# EAGLE board MicroMod-Datalogging-CarrierBoard-Panel (EAGLE 9.5.2), part 1 of 4
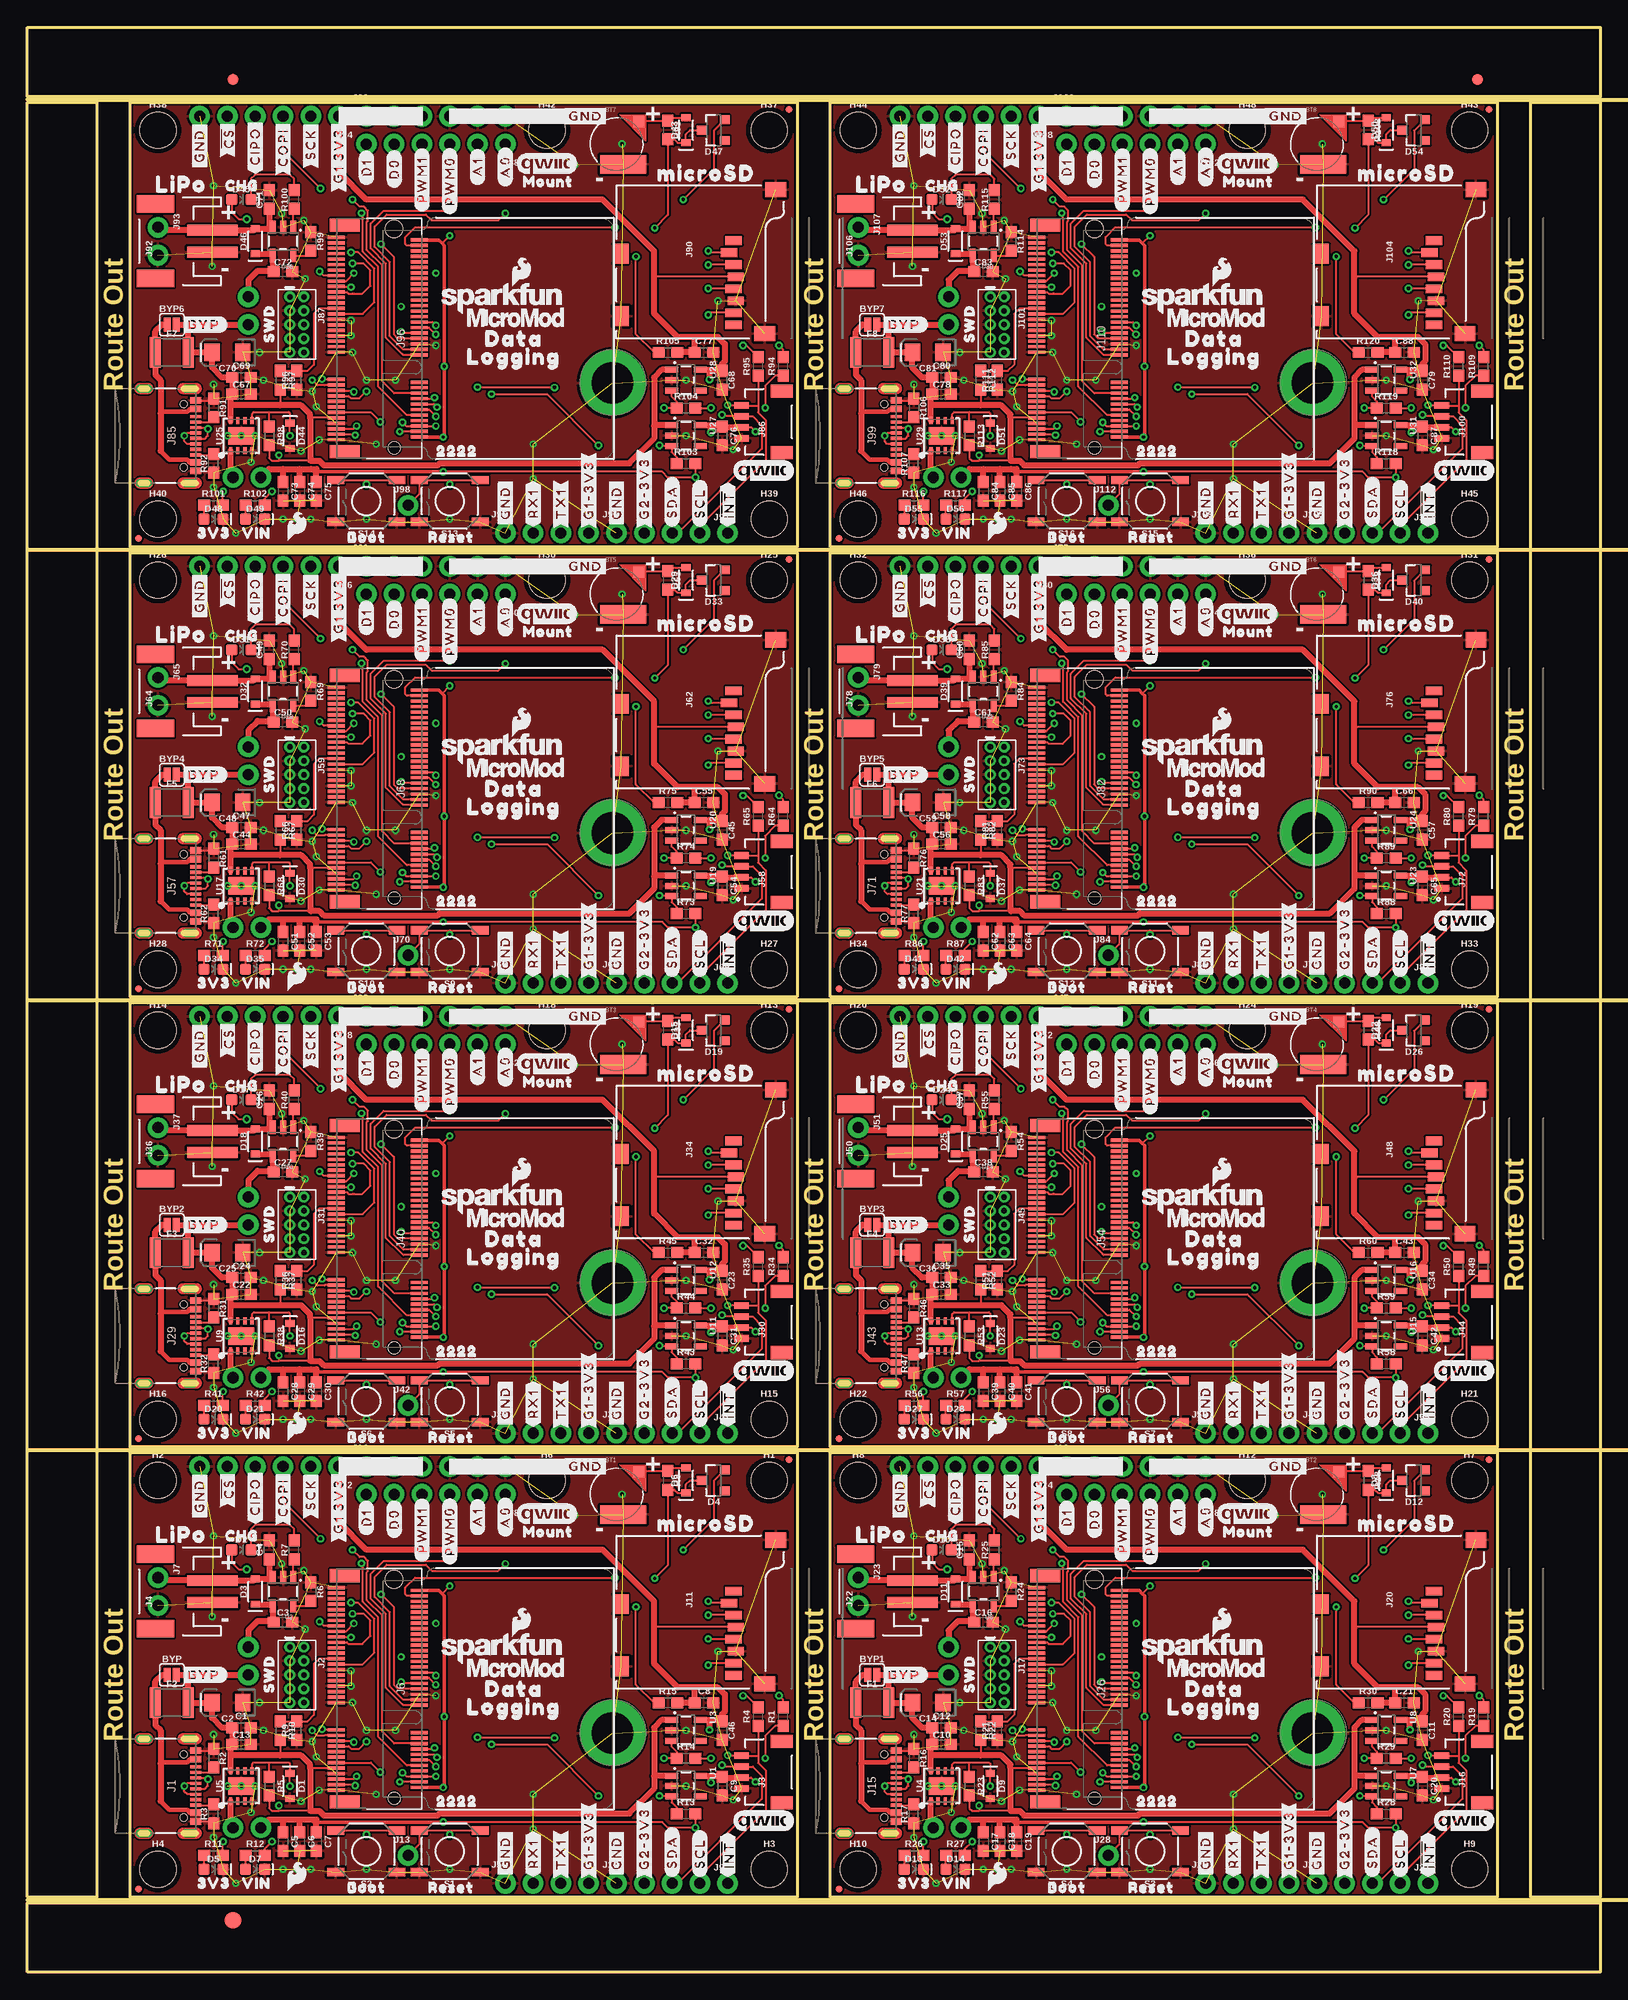
[diagram p0: board, top side]
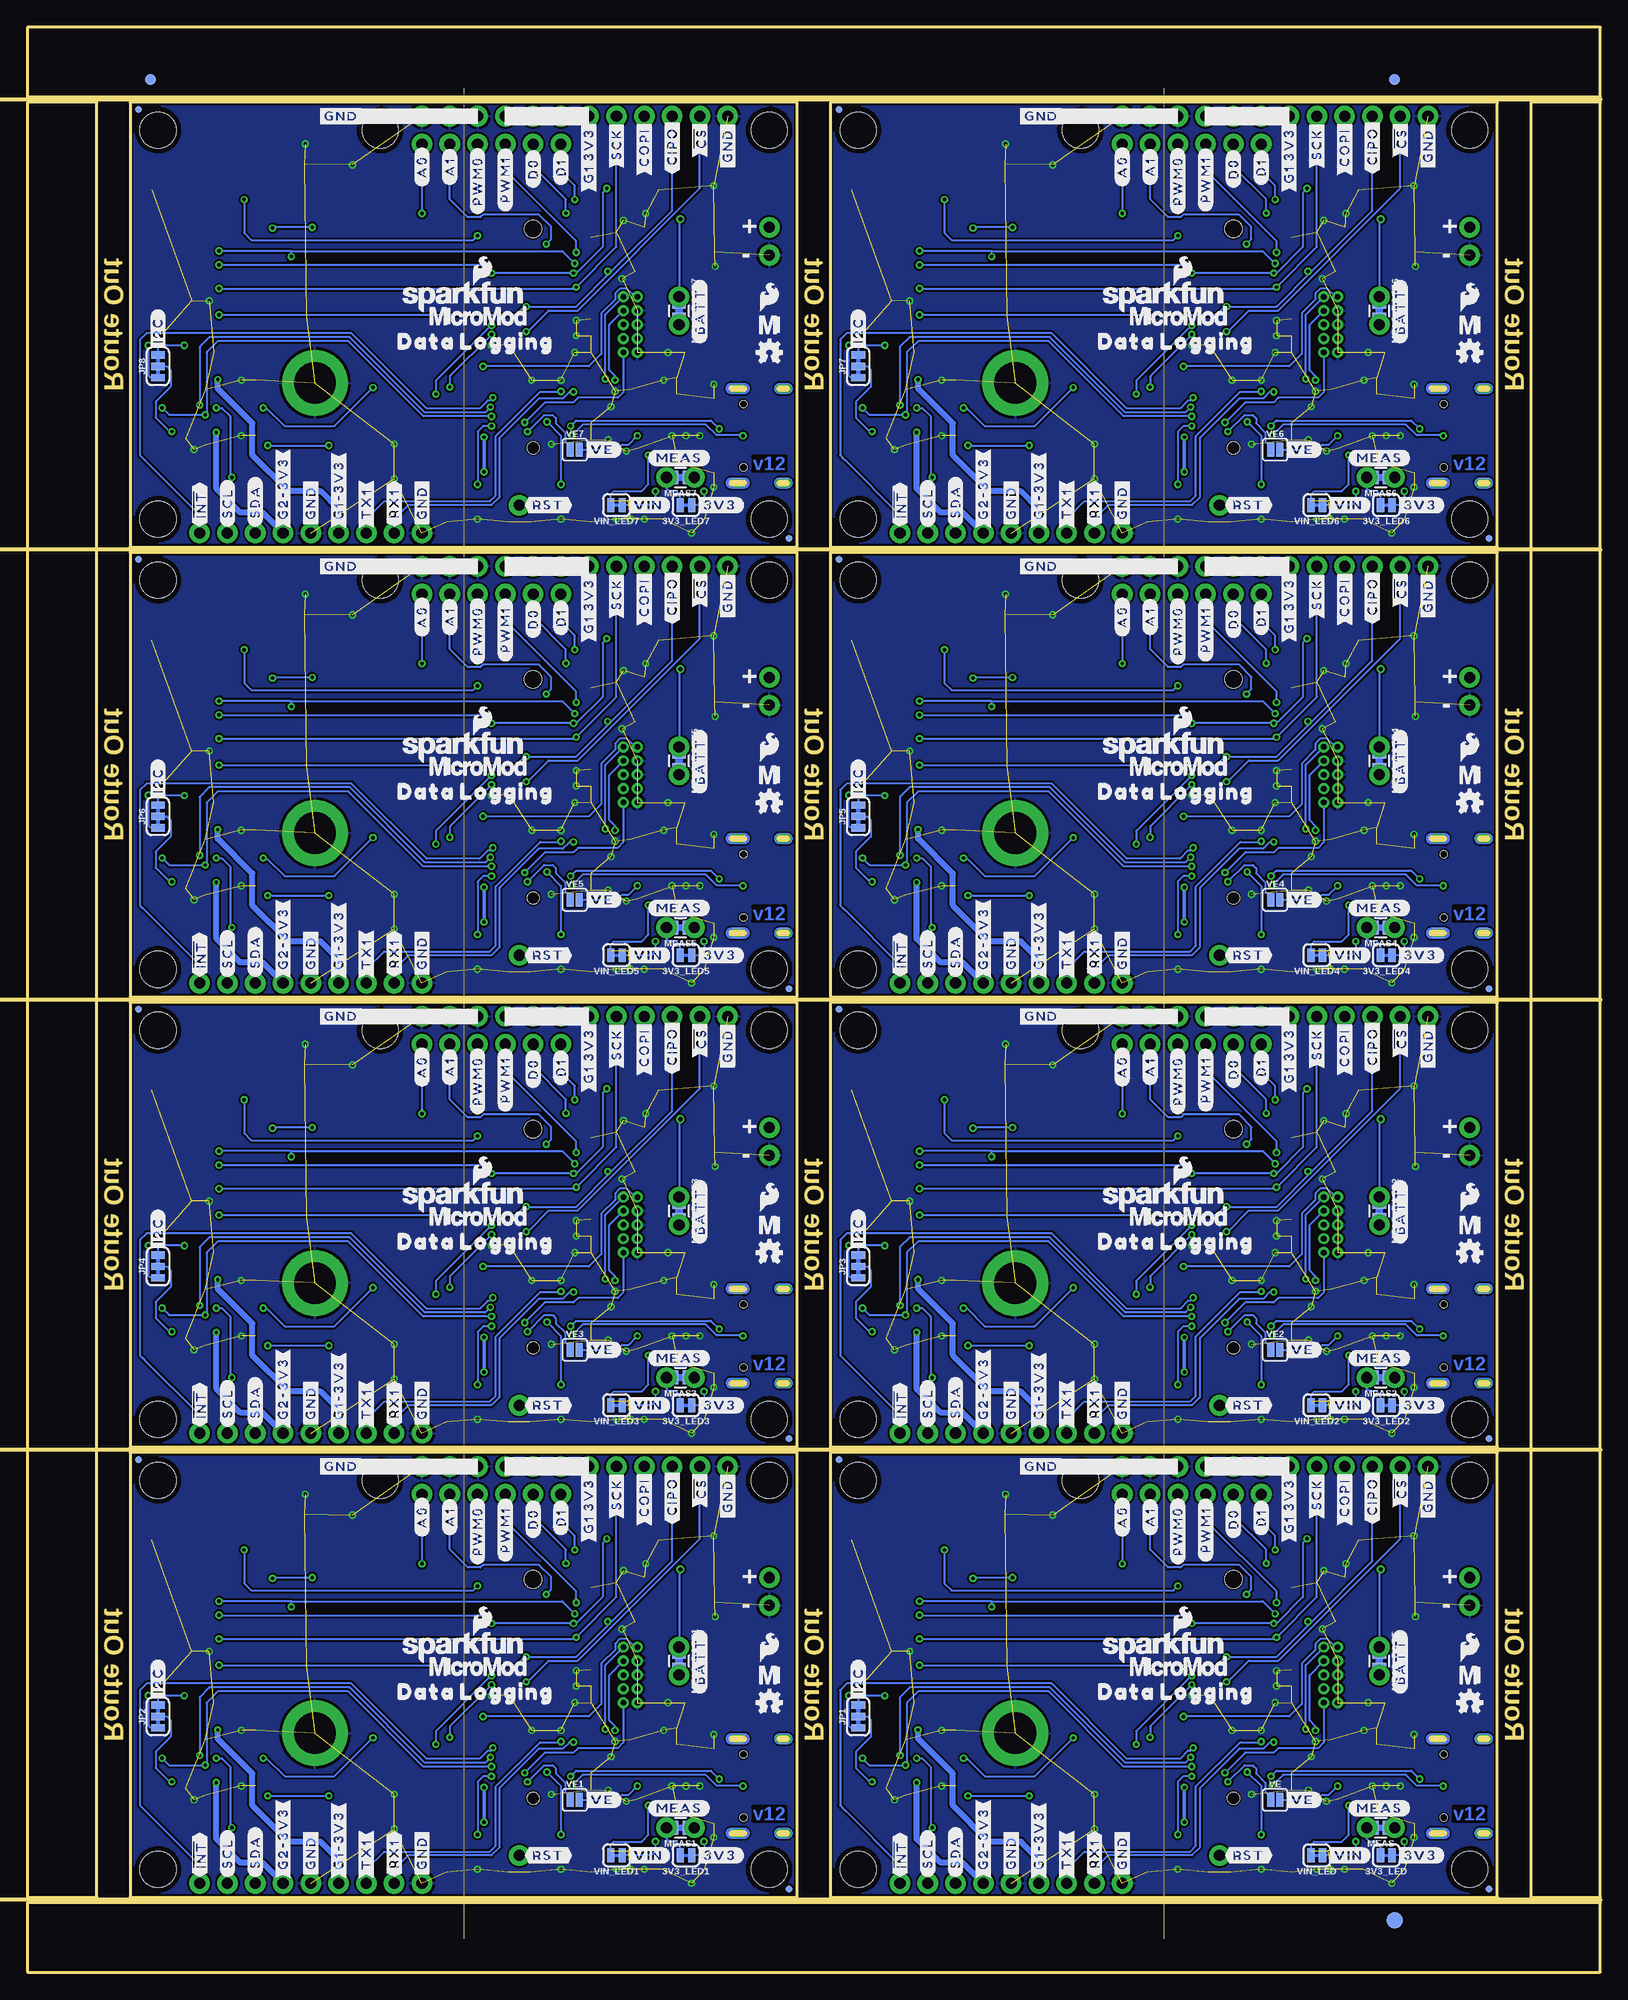
[diagram p1: board, bottom side, seen from below]

Size 143.76 x 177.8 mm. Coordinates in mm from the lower left corner, seen from the top.
Outline: 9.4,6.86 9.4,47.5 70.36,47.5 70.36,6.86 9.4,6.86
Outline: 73.41,6.86 73.41,47.5 134.37,47.5 134.37,6.86 73.41,6.86
Outline: 9.4,48.01 9.4,88.65 70.36,88.65 70.36,48.01 9.4,48.01
Outline: 73.41,48.01 73.41,88.65 134.37,88.65 134.37,48.01 73.41,48.01
Outline: 9.4,89.15 9.4,129.79 70.36,129.79 70.36,89.15 9.4,89.15
Outline: 73.41,89.15 73.41,129.79 134.37,129.79 134.37,89.15 73.41,89.15
Outline: 9.4,130.3 9.4,170.94 70.36,170.94 70.36,130.3 9.4,130.3
Outline: 73.41,130.3 73.41,170.94 134.37,170.94 134.37,130.3 73.41,130.3
Outline: 0,6.35 143.76,6.35 143.76,0 0,0 0,6.35
Outline: 137.41,170.94 143.76,170.94 143.76,6.86 137.41,6.86 137.41,170.94
Outline: 0,177.8 143.76,177.8 143.76,171.45 0,171.45 0,177.8
Outline: 0,170.94 6.35,170.94 6.35,6.86 0,6.86 0,170.94
Copper layers (1*16): Top 0.035mm / dielectric 1.5mm / Bottom 0.035mm
Design rules "MicroMod-Datalogging-CarrierBoard": minimum track width 7mil, minimum drill 12mil, track to track 7mil, track to pad 7mil, pad to pad 7mil, via to via 7mil, smd to smd 7mil, copper to edge 7mil, drill to drill 7mil, minimum pad ring 7mil, minimum via ring 7mil, stop-mask expansion 4mil, vias tented up to drill 25mil, thermal gap 10mil
Net classes: 0 default: width 0 mm, drill 0 mm
Milling: 5 lines

## Footprints (pad centres in the part's own frame; a part is rotated, then mirrored left to right if it is on the bottom)
SMT-JUMPER_2_NC_TRACE_SILK = smd 0.66 x 1.27: 1 -0.521,0; 2 0.521,0
ML414H_IV01E = smd 1 x 1: + 2.022,2.032 | smd 4.2 x 1.7: - 0.6,-1.85
SMT-JUMPER_2_NO_SILK = smd 0.635 x 1.27: 1 -0.406,0; 2 0.406,0
0603 = smd 1.1 x 1: 1 -0.85,0; 2 0.85,0
EIA3216 = smd 1.4 x 1.6: + 1.4,0; - -1.4,0
SOD-323 = smd 0.63 x 0.83: A 1.15,0; C -1.15,0
LED-0603 = smd 1 x 1: A -0.877,0; C 0.877,0
SOT23-3 = smd 0.8 x 0.9: 1 -0.95,-1; 2 0.95,-1; 3 0,1.1
FIDUCIAL-1X2 = smd 1 x 1: 1 0,0
FIDUCIAL-1.5X3 = smd 1.5 x 1.5: 1 0,0
1210 = smd 1 x 2.8: 1 -1.5,0; 2 1.5,0
FIDUCIAL-MICRO = smd 0.635 x 0.635: 1 0,0
STAND-OFF = hole 3.302: 0,0
STAND-OFF-REFLOW-M2.5 = drill 3.8 pad 6: 1 0,0
USB-C-16P-2LAYER-PADS = smd 0.3 x 1: A5 -1.25,-0.34; A6 -0.25,-0.34; A7 0.25,-0.34; A8 1.25,-0.34; B5 1.75,-0.34; B6 0.75,-0.34; B7 -0.75,-0.34; B8 -1.75,-0.34 | smd 0.6 x 1: GND -3.225,-0.34; GND2 3.225,-0.34; VBUS1 -2.45,-0.34; VBUS2 2.45,-0.34 | drill 0.4 pad 0.6 long: SHLD1 -4.318,-0.915; SHLD2 4.318,-0.915; SHLD3 -4.318,-5.095; SHLD4 4.318,-5.095 | hole 0.65: -2.89,-1.445; 2.89,-1.445
2X5-PTH-1.27MM = drill 0.508 pad 1: 1 -2.54,-0.635; 2 -2.54,0.635; 3 -1.27,-0.635; 4 -1.27,0.635; 5 0,-0.635; 6 0,0.635; 7 1.27,-0.635; 8 1.27,0.635; 9 2.54,-0.635; 10 2.54,0.635
JST04_1MM_RA = smd 0.6 x 1.35: 1 -1.5,0; 2 -0.5,0; 3 0.5,0; 4 1.5,0 | smd 1.2 x 2: NC1 2.8,-3.675; NC2 -2.8,-3.675
JST-2-SMD = smd 1 x 4.6: 1 -1,-3.7; 2 1,-3.7 | smd 1.6 x 3.4: NC1 -3.4,1.5; NC2 3.4,1.5
1X04_NO_SILK = drill 1.016 pad 1.88: 1 0,0; 2 2.54,0; 3 5.08,0; 4 7.62,0
M.2-CONNECTOR-E = smd 0.3 x 1.55: 1 9.25,-5.275; 2 9,2.275; 3 8.75,-5.275; 4 8.5,2.275; 5 8.25,-5.275; 6 8,2.275; 7 7.75,-5.275; 8 7.5,2.275; 9 7.25,-5.275; 10 7,2.275; 11 6.75,-5.275; 12 6.5,2.275; 13 6.25,-5.275; 14 6,2.275; 15 5.75,-5.275; 16 5.5,2.275; 17 5.25,-5.275; 18 5,2.275; 19 4.75,-5.275; 20 4.5,2.275; 21 4.25,-5.275; 22 4,2.275; 23 3.75,-5.275; 32 1.5,2.275; 33 1.25,-5.275; 34 1,2.275; 35 0.75,-5.275; 36 0.5,2.275; 37 0.25,-5.275; 38 0,2.275; 39 -0.25,-5.275; 40 -0.5,2.275; 41 -0.75,-5.275; 42 -1,2.275; 43 -1.25,-5.275; 44 -1.5,2.275; 45 -1.75,-5.275; 46 -2,2.275; 47 -2.25,-5.275; 48 -2.5,2.275; 49 -2.75,-5.275; 50 -3,2.275; 51 -3.25,-5.275; 52 -3.5,2.275; 53 -3.75,-5.275; 54 -4,2.275; 55 -4.25,-5.275; 56 -4.5,2.275; 57 -4.75,-5.275; 58 -5,2.275; 59 -5.25,-5.275; 60 -5.5,2.275; 61 -5.75,-5.275; 62 -6,2.275; 63 -6.25,-5.275; 64 -6.5,2.275; 65 -6.75,-5.275; 66 -7,2.275; 67 -7.25,-5.275; 68 -7.5,2.275; 69 -7.75,-5.275; 70 -8,2.275; 71 -8.25,-5.275; 72 -8.5,2.275; 73 -8.75,-5.275; 74 -9,2.275; 75 -9.25,-5.275 | smd 1.2 x 2.75: A1 10.35,-4.5; A2 -10.35,-4.5 | hole 1.1: 10,0 | hole 1.6: -10,0
1X02_NO_SILK = drill 1.016 pad 1.88: 1 0,0; 2 2.54,0
1X06_NO_SILK = drill 1.016 pad 1.88: 1 0,0; 2 2.54,0; 3 5.08,0; 4 7.62,0; 5 10.16,0; 6 12.7,0
1X01_NO_SILK = drill 1.016 pad 1.88: 1 0,0
MICRO-SD-SOCKET = smd 1.8 x 1.4: CD1 -2.05,0.4; CD2 -7.75,0.4 | smd 0.8 x 1.5: CS/DAT3 -7.84,10.3; DAT1 -1.24,10.7; DAT2 -8.94,10.7; DI/CMD -6.74,10.7; DO/DAT0 -2.34,10.7; GND -3.44,10.9; SCLK -4.54,10.7; VCC -5.64,10.9 | smd 1.4 x 1.9: GND1 -13.6,14.55; GND3 -0.45,13.55
SMT-JUMPER_3_2-NC_TRACE_SILK = smd 0.66 x 1.27: 1 -1.041,0; 2 0,0; 3 1.041,0
COMBO-JUMPER_2_NC_TRACE = smd 0.635 x 1.27: 1 -0.508,0; 2 0.508,0 | drill 1.016 pad 1.88: 3 -1.27,0; 4 1.27,0
TACTILE_SWITCH_SMD_5.2MM = smd 1.524 x 0.762: 1 -2.794,1.905; 2 2.794,1.905; 3 -2.794,-1.905; 4 2.794,-1.905
SOT23-5 = smd 0.55 x 1.2: 1 -0.95,-1.3; 2 0,-1.3; 3 0.95,-1.3; 4 0.95,1.3; 5 -0.95,1.3
UDFN-8 = smd 0.3 x 0.65: 1 -0.975,-1.375; 2 -0.325,-1.375; 3 0.325,-1.375; 4 0.975,-1.375; 5 0.975,1.375; 6 0.325,1.375; 7 -0.325,1.375; 8 -0.975,1.375 | smd 2.35 x 1.6: EP 0,0

## Placement (x,y rotation side)
3V3_LED  [SMT-JUMPER_2_NC_TRACE_SILK]  19.56,10.67 180 bottom
3V3_LED1  [SMT-JUMPER_2_NC_TRACE_SILK]  83.57,10.67 180 bottom
3V3_LED2  [SMT-JUMPER_2_NC_TRACE_SILK]  19.56,51.82 180 bottom
3V3_LED3  [SMT-JUMPER_2_NC_TRACE_SILK]  83.57,51.82 180 bottom
3V3_LED4  [SMT-JUMPER_2_NC_TRACE_SILK]  19.56,92.96 180 bottom
3V3_LED5  [SMT-JUMPER_2_NC_TRACE_SILK]  83.57,92.96 180 bottom
3V3_LED6  [SMT-JUMPER_2_NC_TRACE_SILK]  19.56,134.11 180 bottom
3V3_LED7  [SMT-JUMPER_2_NC_TRACE_SILK]  83.57,134.11 180 bottom
BT1  ML414H  [ML414H_IV01E]  53.85,43.69 0 top
BT2  ML414H  [ML414H_IV01E]  117.86,43.69 0 top
BT3  ML414H  [ML414H_IV01E]  53.85,84.84 0 top
BT4  ML414H  [ML414H_IV01E]  117.86,84.84 0 top
BT5  ML414H  [ML414H_IV01E]  53.85,125.98 0 top
BT6  ML414H  [ML414H_IV01E]  117.86,125.98 0 top
BT7  ML414H  [ML414H_IV01E]  53.85,167.13 0 top
BT8  ML414H  [ML414H_IV01E]  117.86,167.13 0 top
BYP  JUMPER-SMT_2_NO_SILK  [SMT-JUMPER_2_NO_SILK]  13.21,27.18 0 top
BYP1  JUMPER-SMT_2_NO_SILK  [SMT-JUMPER_2_NO_SILK]  77.22,27.18 0 top
BYP2  JUMPER-SMT_2_NO_SILK  [SMT-JUMPER_2_NO_SILK]  13.21,68.33 0 top
BYP3  JUMPER-SMT_2_NO_SILK  [SMT-JUMPER_2_NO_SILK]  77.22,68.33 0 top
BYP4  JUMPER-SMT_2_NO_SILK  [SMT-JUMPER_2_NO_SILK]  13.21,109.47 0 top
BYP5  JUMPER-SMT_2_NO_SILK  [SMT-JUMPER_2_NO_SILK]  77.22,109.47 0 top
BYP6  JUMPER-SMT_2_NO_SILK  [SMT-JUMPER_2_NO_SILK]  13.21,150.62 0 top
BYP7  JUMPER-SMT_2_NO_SILK  [SMT-JUMPER_2_NO_SILK]  77.22,150.62 0 top
C1  0.1uF  [0603]  19.56,22.35 0 top
C2  10uF  [EIA3216]  18.29,24.64 180 top
C3  4.7uF  [0603]  23.37,32 0 top
C4  4.7uF  [0603]  22.1,38.61 90 top
C5  1.0uF  [0603]  23.37,11.94 270 top
C6  0.1uF  [0603]  24.89,11.94 270 top
C7  0.22uF  [0603]  26.42,11.94 270 top
C8  1.0uF  [0603]  61.85,24.64 0 top
C9  1.0uF  [0603]  63.5,17.02 270 top
C10  0.22uF  [0603]  83.57,20.83 0 top
C11  0.1uF  [0603]  127.51,22.1 270 top
C12  0.1uF  [0603]  83.57,22.35 0 top
C13  0.22uF  [0603]  19.56,20.83 0 top
C14  10uF  [EIA3216]  82.3,24.64 180 top
C15  4.7uF  [0603]  86.11,38.61 90 top
C16  4.7uF  [0603]  87.38,32 0 top
C17  1.0uF  [0603]  87.38,11.94 270 top
C18  0.1uF  [0603]  88.9,11.94 270 top
C19  0.22uF  [0603]  90.42,11.94 270 top
C20  1.0uF  [0603]  127.51,17.02 270 top
C21  1.0uF  [0603]  125.86,24.64 0 top
C22  0.22uF  [0603]  19.56,61.98 0 top
C23  0.1uF  [0603]  63.5,63.25 270 top
C24  0.1uF  [0603]  19.56,63.5 0 top
C25  10uF  [EIA3216]  18.29,65.79 180 top
C26  4.7uF  [0603]  22.1,79.76 90 top
C27  4.7uF  [0603]  23.37,73.15 0 top
C28  1.0uF  [0603]  23.37,53.09 270 top
C29  0.1uF  [0603]  24.89,53.09 270 top
C30  0.22uF  [0603]  26.42,53.09 270 top
C31  1.0uF  [0603]  63.5,58.17 270 top
C32  1.0uF  [0603]  61.85,65.79 0 top
C33  0.22uF  [0603]  83.57,61.98 0 top
C34  0.1uF  [0603]  127.51,63.25 270 top
C35  0.1uF  [0603]  83.57,63.5 0 top
C36  10uF  [EIA3216]  82.3,65.79 180 top
C37  4.7uF  [0603]  86.11,79.76 90 top
C38  4.7uF  [0603]  87.38,73.15 0 top
C39  1.0uF  [0603]  87.38,53.09 270 top
C40  0.1uF  [0603]  88.9,53.09 270 top
C41  0.22uF  [0603]  90.42,53.09 270 top
C42  1.0uF  [0603]  127.51,58.17 270 top
C43  1.0uF  [0603]  125.86,65.79 0 top
C44  0.22uF  [0603]  19.56,103.12 0 top
C45  0.1uF  [0603]  63.5,104.39 270 top
C46  0.1uF  [0603]  63.5,22.1 270 top
C47  0.1uF  [0603]  19.56,104.65 0 top
C48  10uF  [EIA3216]  18.29,106.93 180 top
C49  4.7uF  [0603]  22.1,120.9 90 top
C50  4.7uF  [0603]  23.37,114.3 0 top
C51  1.0uF  [0603]  23.37,94.23 270 top
C52  0.1uF  [0603]  24.89,94.23 270 top
C53  0.22uF  [0603]  26.42,94.23 270 top
C54  1.0uF  [0603]  63.5,99.31 270 top
C55  1.0uF  [0603]  61.85,106.93 0 top
C56  0.22uF  [0603]  83.57,103.12 0 top
C57  0.1uF  [0603]  127.51,104.39 270 top
C58  0.1uF  [0603]  83.57,104.65 0 top
C59  10uF  [EIA3216]  82.3,106.93 180 top
C60  4.7uF  [0603]  86.11,120.9 90 top
C61  4.7uF  [0603]  87.38,114.3 0 top
C62  1.0uF  [0603]  87.38,94.23 270 top
C63  0.1uF  [0603]  88.9,94.23 270 top
C64  0.22uF  [0603]  90.42,94.23 270 top
C65  1.0uF  [0603]  127.51,99.31 270 top
C66  1.0uF  [0603]  125.86,106.93 0 top
C67  0.22uF  [0603]  19.56,144.27 0 top
C68  0.1uF  [0603]  63.5,145.54 270 top
C69  0.1uF  [0603]  19.56,145.8 0 top
C70  10uF  [EIA3216]  18.29,148.08 180 top
C71  4.7uF  [0603]  22.1,162.05 90 top
C72  4.7uF  [0603]  23.37,155.45 0 top
C73  1.0uF  [0603]  23.37,135.38 270 top
C74  0.1uF  [0603]  24.89,135.38 270 top
C75  0.22uF  [0603]  26.42,135.38 270 top
C76  1.0uF  [0603]  63.5,140.46 270 top
C77  1.0uF  [0603]  61.85,148.08 0 top
C78  0.22uF  [0603]  83.57,144.27 0 top
C79  0.1uF  [0603]  127.51,145.54 270 top
C80  0.1uF  [0603]  83.57,145.8 0 top
C81  10uF  [EIA3216]  82.3,148.08 180 top
C82  4.7uF  [0603]  86.11,162.05 90 top
C83  4.7uF  [0603]  87.38,155.45 0 top
C84  1.0uF  [0603]  87.38,135.38 270 top
C85  0.1uF  [0603]  88.9,135.38 270 top
C86  0.22uF  [0603]  90.42,135.38 270 top
C87  1.0uF  [0603]  127.51,140.46 270 top
C88  1.0uF  [0603]  125.86,148.08 0 top
D1  3.3V  [SOD-323]  24,17.02 270 top
D2  Yellow  [LED-0603]  19.56,38.61 0 top
D3  3A/10V/280mV  [SOD-323]  20.83,34.8 90 top
D4  BAS70-05  [SOT23-3]  62.74,44.96 90 top
D5  RED  [LED-0603]  17.02,9.4 0 top
D6  3A/10V/280mV  [SOD-323]  60.2,44.96 90 top
D7  Yellow  [LED-0603]  20.83,9.4 0 top
D8  3A/10V/280mV  [SOD-323]  124.21,44.96 90 top
D9  3.3V  [SOD-323]  88.01,17.02 270 top
D10  Yellow  [LED-0603]  83.57,38.61 0 top
D11  3A/10V/280mV  [SOD-323]  84.84,34.8 90 top
D12  BAS70-05  [SOT23-3]  126.75,44.96 90 top
D13  RED  [LED-0603]  81.03,9.4 0 top
D14  Yellow  [LED-0603]  84.84,9.4 0 top
D15  3A/10V/280mV  [SOD-323]  60.2,86.11 90 top
D16  3.3V  [SOD-323]  24,58.17 270 top
D17  Yellow  [LED-0603]  19.56,79.76 0 top
D18  3A/10V/280mV  [SOD-323]  20.83,75.95 90 top
D19  BAS70-05  [SOT23-3]  62.74,86.11 90 top
D20  RED  [LED-0603]  17.02,50.55 0 top
D21  Yellow  [LED-0603]  20.83,50.55 0 top
D22  3A/10V/280mV  [SOD-323]  124.21,86.11 90 top
D23  3.3V  [SOD-323]  88.01,58.17 270 top
D24  Yellow  [LED-0603]  83.57,79.76 0 top
D25  3A/10V/280mV  [SOD-323]  84.84,75.95 90 top
D26  BAS70-05  [SOT23-3]  126.75,86.11 90 top
D27  RED  [LED-0603]  81.03,50.55 0 top
D28  Yellow  [LED-0603]  84.84,50.55 0 top
D29  3A/10V/280mV  [SOD-323]  60.2,127.25 90 top
D30  3.3V  [SOD-323]  24,99.31 270 top
D31  Yellow  [LED-0603]  19.56,120.9 0 top
D32  3A/10V/280mV  [SOD-323]  20.83,117.09 90 top
D33  BAS70-05  [SOT23-3]  62.74,127.25 90 top
D34  RED  [LED-0603]  17.02,91.69 0 top
D35  Yellow  [LED-0603]  20.83,91.69 0 top
D36  3A/10V/280mV  [SOD-323]  124.21,127.25 90 top
D37  3.3V  [SOD-323]  88.01,99.31 270 top
D38  Yellow  [LED-0603]  83.57,120.9 0 top
D39  3A/10V/280mV  [SOD-323]  84.84,117.09 90 top
D40  BAS70-05  [SOT23-3]  126.75,127.25 90 top
D41  RED  [LED-0603]  81.03,91.69 0 top
D42  Yellow  [LED-0603]  84.84,91.69 0 top
D43  3A/10V/280mV  [SOD-323]  60.2,168.4 90 top
D44  3.3V  [SOD-323]  24,140.46 270 top
D45  Yellow  [LED-0603]  19.56,162.05 0 top
D46  3A/10V/280mV  [SOD-323]  20.83,158.24 90 top
D47  BAS70-05  [SOT23-3]  62.74,168.4 90 top
D48  RED  [LED-0603]  17.02,132.84 0 top
D49  Yellow  [LED-0603]  20.83,132.84 0 top
D50  3A/10V/280mV  [SOD-323]  124.21,168.4 90 top
D51  3.3V  [SOD-323]  88.01,140.46 270 top
D52  Yellow  [LED-0603]  83.57,162.05 0 top
D53  3A/10V/280mV  [SOD-323]  84.84,158.24 90 top
D54  BAS70-05  [SOT23-3]  126.75,168.4 90 top
D55  RED  [LED-0603]  81.03,132.84 0 top
D56  Yellow  [LED-0603]  84.84,132.84 0 top
E$1  [FIDUCIAL-1X2]  18.8,173.04 0 top
E$2  [FIDUCIAL-1X2]  18.8,173.04 0 bottom
E$3  [FIDUCIAL-1X2]  132.52,173.04 0 top
E$4  [FIDUCIAL-1X2]  132.52,173.04 0 bottom
E$5  [FIDUCIAL-1.5X3]  18.8,4.76 0 top
E$6  [FIDUCIAL-1.5X3]  18.8,4.76 0 bottom
F1  6V/2A  [1210]  77.22,24.64 0 top
F2  6V/2A  [1210]  13.21,24.64 0 top
F3  6V/2A  [1210]  13.21,65.79 0 top
F4  6V/2A  [1210]  77.22,65.79 0 top
F5  6V/2A  [1210]  13.21,106.93 0 top
F6  6V/2A  [1210]  77.22,106.93 0 top
F7  6V/2A  [1210]  13.21,148.08 0 top
F8  6V/2A  [1210]  77.22,148.08 0 top
FD1  FIDUCIALUFIDUCIAL  [FIDUCIAL-MICRO]  10.16,7.62 0 top
FD2  FIDUCIALUFIDUCIAL  [FIDUCIAL-MICRO]  69.6,46.86 0 top
FD3  FIDUCIALUFIDUCIAL  [FIDUCIAL-MICRO]  10.16,7.62 0 bottom
FD4  FIDUCIALUFIDUCIAL  [FIDUCIAL-MICRO]  69.6,46.86 0 bottom
FD5  FIDUCIALUFIDUCIAL  [FIDUCIAL-MICRO]  74.17,7.62 0 top
FD6  FIDUCIALUFIDUCIAL  [FIDUCIAL-MICRO]  133.6,46.86 0 top
FD7  FIDUCIALUFIDUCIAL  [FIDUCIAL-MICRO]  74.17,7.62 0 bottom
FD8  FIDUCIALUFIDUCIAL  [FIDUCIAL-MICRO]  133.6,46.86 0 bottom
FD9  FIDUCIALUFIDUCIAL  [FIDUCIAL-MICRO]  10.16,48.77 0 top
FD10  FIDUCIALUFIDUCIAL  [FIDUCIAL-MICRO]  69.6,88.01 0 top
FD11  FIDUCIALUFIDUCIAL  [FIDUCIAL-MICRO]  10.16,48.77 0 bottom
FD12  FIDUCIALUFIDUCIAL  [FIDUCIAL-MICRO]  69.6,88.01 0 bottom
FD13  FIDUCIALUFIDUCIAL  [FIDUCIAL-MICRO]  74.17,48.77 0 top
FD14  FIDUCIALUFIDUCIAL  [FIDUCIAL-MICRO]  133.6,88.01 0 top
FD15  FIDUCIALUFIDUCIAL  [FIDUCIAL-MICRO]  74.17,48.77 0 bottom
FD16  FIDUCIALUFIDUCIAL  [FIDUCIAL-MICRO]  133.6,88.01 0 bottom
FD17  FIDUCIALUFIDUCIAL  [FIDUCIAL-MICRO]  10.16,89.92 0 top
FD18  FIDUCIALUFIDUCIAL  [FIDUCIAL-MICRO]  69.6,129.16 0 top
FD19  FIDUCIALUFIDUCIAL  [FIDUCIAL-MICRO]  10.16,89.92 0 bottom
FD20  FIDUCIALUFIDUCIAL  [FIDUCIAL-MICRO]  69.6,129.16 0 bottom
FD21  FIDUCIALUFIDUCIAL  [FIDUCIAL-MICRO]  74.17,89.92 0 top
FD22  FIDUCIALUFIDUCIAL  [FIDUCIAL-MICRO]  133.6,129.16 0 top
FD23  FIDUCIALUFIDUCIAL  [FIDUCIAL-MICRO]  74.17,89.92 0 bottom
FD24  FIDUCIALUFIDUCIAL  [FIDUCIAL-MICRO]  133.6,129.16 0 bottom
FD25  FIDUCIALUFIDUCIAL  [FIDUCIAL-MICRO]  10.16,131.06 0 top
FD26  FIDUCIALUFIDUCIAL  [FIDUCIAL-MICRO]  69.6,170.31 0 top
FD27  FIDUCIALUFIDUCIAL  [FIDUCIAL-MICRO]  10.16,131.06 0 bottom
FD28  FIDUCIALUFIDUCIAL  [FIDUCIAL-MICRO]  69.6,170.31 0 bottom
FD29  FIDUCIALUFIDUCIAL  [FIDUCIAL-MICRO]  74.17,131.06 0 top
FD30  FIDUCIALUFIDUCIAL  [FIDUCIAL-MICRO]  133.6,170.31 0 top
FD31  FIDUCIALUFIDUCIAL  [FIDUCIAL-MICRO]  74.17,131.06 0 bottom
FD32  FIDUCIALUFIDUCIAL  [FIDUCIAL-MICRO]  133.6,170.31 0 bottom
H1  STAND-OFF  [STAND-OFF]  67.82,44.96 0 top
H2  STAND-OFF  [STAND-OFF]  11.94,44.96 0 top
H3  STAND-OFF  [STAND-OFF]  67.82,9.4 0 top
H4  STAND-OFF  [STAND-OFF]  11.94,9.4 0 top
H5  STAND-OFF-REFLOW2.5MM_TALL  [STAND-OFF-REFLOW-M2.5]  53.47,21.84 0 top
H6  STAND-OFF  [STAND-OFF]  47.5,44.96 0 top
H7  STAND-OFF  [STAND-OFF]  131.83,44.96 0 top
H8  STAND-OFF  [STAND-OFF]  75.95,44.96 0 top
H9  STAND-OFF  [STAND-OFF]  131.83,9.4 0 top
H10  STAND-OFF  [STAND-OFF]  75.95,9.4 0 top
H11  STAND-OFF-REFLOW2.5MM_TALL  [STAND-OFF-REFLOW-M2.5]  117.47,21.84 0 top
H12  STAND-OFF  [STAND-OFF]  111.51,44.96 0 top
H13  STAND-OFF  [STAND-OFF]  67.82,86.11 0 top
H14  STAND-OFF  [STAND-OFF]  11.94,86.11 0 top
H15  STAND-OFF  [STAND-OFF]  67.82,50.55 0 top
H16  STAND-OFF  [STAND-OFF]  11.94,50.55 0 top
H17  STAND-OFF-REFLOW2.5MM_TALL  [STAND-OFF-REFLOW-M2.5]  53.47,62.99 0 top
H18  STAND-OFF  [STAND-OFF]  47.5,86.11 0 top
H19  STAND-OFF  [STAND-OFF]  131.83,86.11 0 top
H20  STAND-OFF  [STAND-OFF]  75.95,86.11 0 top
H21  STAND-OFF  [STAND-OFF]  131.83,50.55 0 top
H22  STAND-OFF  [STAND-OFF]  75.95,50.55 0 top
H23  STAND-OFF-REFLOW2.5MM_TALL  [STAND-OFF-REFLOW-M2.5]  117.47,62.99 0 top
H24  STAND-OFF  [STAND-OFF]  111.51,86.11 0 top
H25  STAND-OFF  [STAND-OFF]  67.82,127.25 0 top
H26  STAND-OFF  [STAND-OFF]  11.94,127.25 0 top
H27  STAND-OFF  [STAND-OFF]  67.82,91.69 0 top
H28  STAND-OFF  [STAND-OFF]  11.94,91.69 0 top
H29  STAND-OFF-REFLOW2.5MM_TALL  [STAND-OFF-REFLOW-M2.5]  53.47,104.14 0 top
H30  STAND-OFF  [STAND-OFF]  47.5,127.25 0 top
H31  STAND-OFF  [STAND-OFF]  131.83,127.25 0 top
H32  STAND-OFF  [STAND-OFF]  75.95,127.25 0 top
H33  STAND-OFF  [STAND-OFF]  131.83,91.69 0 top
H34  STAND-OFF  [STAND-OFF]  75.95,91.69 0 top
H35  STAND-OFF-REFLOW2.5MM_TALL  [STAND-OFF-REFLOW-M2.5]  117.47,104.14 0 top
H36  STAND-OFF  [STAND-OFF]  111.51,127.25 0 top
H37  STAND-OFF  [STAND-OFF]  67.82,168.4 0 top
H38  STAND-OFF  [STAND-OFF]  11.94,168.4 0 top
H39  STAND-OFF  [STAND-OFF]  67.82,132.84 0 top
H40  STAND-OFF  [STAND-OFF]  11.94,132.84 0 top
H41  STAND-OFF-REFLOW2.5MM_TALL  [STAND-OFF-REFLOW-M2.5]  53.47,145.29 0 top
H42  STAND-OFF  [STAND-OFF]  47.5,168.4 0 top
H43  STAND-OFF  [STAND-OFF]  131.83,168.4 0 top
H44  STAND-OFF  [STAND-OFF]  75.95,168.4 0 top
H45  STAND-OFF  [STAND-OFF]  131.83,132.84 0 top
H46  STAND-OFF  [STAND-OFF]  75.95,132.84 0 top
H47  STAND-OFF-REFLOW2.5MM_TALL  [STAND-OFF-REFLOW-M2.5]  117.47,145.29 0 top
H48  STAND-OFF  [STAND-OFF]  111.51,168.4 0 top
J1  [USB-C-16P-2LAYER-PADS]  15.75,17.02 270 top
J2  JTAG  [2X5-PTH-1.27MM]  24.64,27.18 270 top
J3  QWIIC_RIGHT_ANGLE  [JST04_1MM_RA]  65.28,18.29 90 top
J4  [JST-2-SMD]  13.21,34.8 90 top
J5  UART  [1X04_NO_SILK]  43.69,8.13 0 top
J6  MICROMOD-2222-C  [M.2-CONNECTOR-E]  33.53,25.91 270 top
J7  [1X02_NO_SILK]  11.94,36.07 270 top
J8  Dedicated  [1X06_NO_SILK]  43.69,43.69 180 top
J9  [1X01_NO_SILK]  64.01,8.13 0 top
J10  [1X06_NO_SILK]  30.99,46.23 0 top
J11  microSD  [MICRO-SD-SOCKET]  53.85,25.91 270 top
J12  SPI  [1X06_NO_SILK]  28.45,46.23 180 top
J13  [1X01_NO_SILK]  34.8,10.67 0 top
J14  I2C  [1X04_NO_SILK]  53.85,8.13 0 top
J15  [USB-C-16P-2LAYER-PADS]  79.76,17.02 270 top
J16  QWIIC_RIGHT_ANGLE  [JST04_1MM_RA]  129.29,18.29 90 top
J17  JTAG  [2X5-PTH-1.27MM]  88.65,27.18 270 top
J18  Dedicated  [1X06_NO_SILK]  107.7,43.69 180 top
J19  [1X06_NO_SILK]  95,46.23 0 top
J20  microSD  [MICRO-SD-SOCKET]  117.86,25.91 270 top
J21  I2C  [1X04_NO_SILK]  117.86,8.13 0 top
J22  [JST-2-SMD]  77.22,34.8 90 top
J23  [1X02_NO_SILK]  75.95,36.07 270 top
J24  SPI  [1X06_NO_SILK]  92.46,46.23 180 top
J25  UART  [1X04_NO_SILK]  107.7,8.13 0 top
J26  MICROMOD-2222-C  [M.2-CONNECTOR-E]  97.54,25.91 270 top
J27  [1X01_NO_SILK]  128.02,8.13 0 top
J28  [1X01_NO_SILK]  98.81,10.67 0 top
J29  [USB-C-16P-2LAYER-PADS]  15.75,58.17 270 top
J30  QWIIC_RIGHT_ANGLE  [JST04_1MM_RA]  65.28,59.44 90 top
J31  JTAG  [2X5-PTH-1.27MM]  24.64,68.33 270 top
J32  Dedicated  [1X06_NO_SILK]  43.69,84.84 180 top
J33  [1X06_NO_SILK]  30.99,87.38 0 top
J34  microSD  [MICRO-SD-SOCKET]  53.85,67.06 270 top
J35  I2C  [1X04_NO_SILK]  53.85,49.28 0 top
J36  [JST-2-SMD]  13.21,75.95 90 top
J37  [1X02_NO_SILK]  11.94,77.22 270 top
J38  SPI  [1X06_NO_SILK]  28.45,87.38 180 top
J39  UART  [1X04_NO_SILK]  43.69,49.28 0 top
J40  MICROMOD-2222-C  [M.2-CONNECTOR-E]  33.53,67.06 270 top
J41  [1X01_NO_SILK]  64.01,49.28 0 top
J42  [1X01_NO_SILK]  34.8,51.82 0 top
J43  [USB-C-16P-2LAYER-PADS]  79.76,58.17 270 top
J44  QWIIC_RIGHT_ANGLE  [JST04_1MM_RA]  129.29,59.44 90 top
J45  JTAG  [2X5-PTH-1.27MM]  88.65,68.33 270 top
J46  Dedicated  [1X06_NO_SILK]  107.7,84.84 180 top
J47  [1X06_NO_SILK]  95,87.38 0 top
J48  microSD  [MICRO-SD-SOCKET]  117.86,67.06 270 top
J49  I2C  [1X04_NO_SILK]  117.86,49.28 0 top
J50  [JST-2-SMD]  77.22,75.95 90 top
J51  [1X02_NO_SILK]  75.95,77.22 270 top
J52  SPI  [1X06_NO_SILK]  92.46,87.38 180 top
J53  UART  [1X04_NO_SILK]  107.7,49.28 0 top
J54  MICROMOD-2222-C  [M.2-CONNECTOR-E]  97.54,67.06 270 top
J55  [1X01_NO_SILK]  128.02,49.28 0 top
J56  [1X01_NO_SILK]  98.81,51.82 0 top
J57  [USB-C-16P-2LAYER-PADS]  15.75,99.31 270 top
J58  QWIIC_RIGHT_ANGLE  [JST04_1MM_RA]  65.28,100.58 90 top
J59  JTAG  [2X5-PTH-1.27MM]  24.64,109.47 270 top
J60  Dedicated  [1X06_NO_SILK]  43.69,125.98 180 top
J61  [1X06_NO_SILK]  30.99,128.52 0 top
J62  microSD  [MICRO-SD-SOCKET]  53.85,108.2 270 top
J63  I2C  [1X04_NO_SILK]  53.85,90.42 0 top
J64  [JST-2-SMD]  13.21,117.09 90 top
J65  [1X02_NO_SILK]  11.94,118.36 270 top
J66  SPI  [1X06_NO_SILK]  28.45,128.52 180 top
J67  UART  [1X04_NO_SILK]  43.69,90.42 0 top
J68  MICROMOD-2222-C  [M.2-CONNECTOR-E]  33.53,108.2 270 top
J69  [1X01_NO_SILK]  64.01,90.42 0 top
J70  [1X01_NO_SILK]  34.8,92.96 0 top
J71  [USB-C-16P-2LAYER-PADS]  79.76,99.31 270 top
J72  QWIIC_RIGHT_ANGLE  [JST04_1MM_RA]  129.29,100.58 90 top
J73  JTAG  [2X5-PTH-1.27MM]  88.65,109.47 270 top
J74  Dedicated  [1X06_NO_SILK]  107.7,125.98 180 top
J75  [1X06_NO_SILK]  95,128.52 0 top
J76  microSD  [MICRO-SD-SOCKET]  117.86,108.2 270 top
J77  I2C  [1X04_NO_SILK]  117.86,90.42 0 top
J78  [JST-2-SMD]  77.22,117.09 90 top
J79  [1X02_NO_SILK]  75.95,118.36 270 top
J80  SPI  [1X06_NO_SILK]  92.46,128.52 180 top
J81  UART  [1X04_NO_SILK]  107.7,90.42 0 top
J82  MICROMOD-2222-C  [M.2-CONNECTOR-E]  97.54,108.2 270 top
J83  [1X01_NO_SILK]  128.02,90.42 0 top
J84  [1X01_NO_SILK]  98.81,92.96 0 top
J85  [USB-C-16P-2LAYER-PADS]  15.75,140.46 270 top
J86  QWIIC_RIGHT_ANGLE  [JST04_1MM_RA]  65.28,141.73 90 top
J87  JTAG  [2X5-PTH-1.27MM]  24.64,150.62 270 top
J88  Dedicated  [1X06_NO_SILK]  43.69,167.13 180 top
J89  [1X06_NO_SILK]  30.99,169.67 0 top
J90  microSD  [MICRO-SD-SOCKET]  53.85,149.35 270 top
J91  I2C  [1X04_NO_SILK]  53.85,131.57 0 top
J92  [JST-2-SMD]  13.21,158.24 90 top
J93  [1X02_NO_SILK]  11.94,159.51 270 top
J94  SPI  [1X06_NO_SILK]  28.45,169.67 180 top
J95  UART  [1X04_NO_SILK]  43.69,131.57 0 top
J96  MICROMOD-2222-C  [M.2-CONNECTOR-E]  33.53,149.35 270 top
J97  [1X01_NO_SILK]  64.01,131.57 0 top
J98  [1X01_NO_SILK]  34.8,134.11 0 top
J99  [USB-C-16P-2LAYER-PADS]  79.76,140.46 270 top
J100  QWIIC_RIGHT_ANGLE  [JST04_1MM_RA]  129.29,141.73 90 top
J101  JTAG  [2X5-PTH-1.27MM]  88.65,150.62 270 top
J102  Dedicated  [1X06_NO_SILK]  107.7,167.13 180 top
J103  [1X06_NO_SILK]  95,169.67 0 top
J104  microSD  [MICRO-SD-SOCKET]  117.86,149.35 270 top
J105  I2C  [1X04_NO_SILK]  117.86,131.57 0 top
J106  [JST-2-SMD]  77.22,158.24 90 top
J107  [1X02_NO_SILK]  75.95,159.51 270 top
J108  SPI  [1X06_NO_SILK]  92.46,169.67 180 top
J109  UART  [1X04_NO_SILK]  107.7,131.57 0 top
J110  MICROMOD-2222-C  [M.2-CONNECTOR-E]  97.54,149.35 270 top
J111  [1X01_NO_SILK]  128.02,131.57 0 top
J112  [1X01_NO_SILK]  98.81,134.11 0 top
JP1  [SMT-JUMPER_3_2-NC_TRACE_SILK]  67.82,23.37 90 bottom
JP2  [SMT-JUMPER_3_2-NC_TRACE_SILK]  131.83,23.37 90 bottom
JP3  [SMT-JUMPER_3_2-NC_TRACE_SILK]  67.82,64.52 90 bottom
JP4  [SMT-JUMPER_3_2-NC_TRACE_SILK]  131.83,64.52 90 bottom
JP5  [SMT-JUMPER_3_2-NC_TRACE_SILK]  67.82,105.66 90 bottom
JP6  [SMT-JUMPER_3_2-NC_TRACE_SILK]  131.83,105.66 90 bottom
JP7  [SMT-JUMPER_3_2-NC_TRACE_SILK]  67.82,146.81 90 bottom
JP8  [SMT-JUMPER_3_2-NC_TRACE_SILK]  131.83,146.81 90 bottom
LOGO1  SFE_LOGO_NAME_FLAME.1_INCH  [SFE_LOGO_NAME_FLAME_.1]  43.43,29.59 0 top
LOGO2  QWIIC_LOGO_CONNECTOR  [QWIIC_5.5MM]  67.31,13.84 0 top
LOGO3  OSHW-LOGOMINI  [OSHW-LOGO-MINI]  11.94,24.64 0 bottom
LOGO4  SFE_LOGO_NAME_FLAME.1_INCH  [SFE_LOGO_NAME_FLAME_.1]  39.88,29.72 0 bottom
LOGO5  QWIIC_LOGO_CONNECTOR  [QWIIC_5.5MM]  47.5,41.91 0 top
LOGO6  SFE_LOGO_NAME_FLAME.1_INCH  [SFE_LOGO_NAME_FLAME_.1]  107.44,29.59 0 top
LOGO7  QWIIC_LOGO_CONNECTOR  [QWIIC_5.5MM]  131.32,13.84 0 top
LOGO8  OSHW-LOGOMINI  [OSHW-LOGO-MINI]  75.95,24.64 0 bottom
LOGO9  SFE_LOGO_NAME_FLAME.1_INCH  [SFE_LOGO_NAME_FLAME_.1]  103.89,29.72 0 bottom
LOGO10  QWIIC_LOGO_CONNECTOR  [QWIIC_5.5MM]  111.51,41.91 0 top
LOGO11  SFE_LOGO_NAME_FLAME.1_INCH  [SFE_LOGO_NAME_FLAME_.1]  43.43,70.74 0 top
LOGO12  QWIIC_LOGO_CONNECTOR  [QWIIC_5.5MM]  67.31,54.99 0 top
LOGO13  OSHW-LOGOMINI  [OSHW-LOGO-MINI]  11.94,65.79 0 bottom
LOGO14  SFE_LOGO_NAME_FLAME.1_INCH  [SFE_LOGO_NAME_FLAME_.1]  39.88,70.87 0 bottom
LOGO15  QWIIC_LOGO_CONNECTOR  [QWIIC_5.5MM]  47.5,83.06 0 top
LOGO16  SFE_LOGO_NAME_FLAME.1_INCH  [SFE_LOGO_NAME_FLAME_.1]  107.44,70.74 0 top
LOGO17  QWIIC_LOGO_CONNECTOR  [QWIIC_5.5MM]  131.32,54.99 0 top
LOGO18  OSHW-LOGOMINI  [OSHW-LOGO-MINI]  75.95,65.79 0 bottom
LOGO19  SFE_LOGO_NAME_FLAME.1_INCH  [SFE_LOGO_NAME_FLAME_.1]  103.89,70.87 0 bottom
LOGO20  QWIIC_LOGO_CONNECTOR  [QWIIC_5.5MM]  111.51,83.06 0 top
LOGO21  SFE_LOGO_NAME_FLAME.1_INCH  [SFE_LOGO_NAME_FLAME_.1]  43.43,111.89 0 top
LOGO22  QWIIC_LOGO_CONNECTOR  [QWIIC_5.5MM]  67.31,96.14 0 top
LOGO23  OSHW-LOGOMINI  [OSHW-LOGO-MINI]  11.94,106.93 0 bottom
LOGO24  SFE_LOGO_NAME_FLAME.1_INCH  [SFE_LOGO_NAME_FLAME_.1]  39.88,112.01 0 bottom
LOGO25  QWIIC_LOGO_CONNECTOR  [QWIIC_5.5MM]  47.5,124.21 0 top
LOGO26  SFE_LOGO_NAME_FLAME.1_INCH  [SFE_LOGO_NAME_FLAME_.1]  107.44,111.89 0 top
LOGO27  QWIIC_LOGO_CONNECTOR  [QWIIC_5.5MM]  131.32,96.14 0 top
LOGO28  OSHW-LOGOMINI  [OSHW-LOGO-MINI]  75.95,106.93 0 bottom
LOGO29  SFE_LOGO_NAME_FLAME.1_INCH  [SFE_LOGO_NAME_FLAME_.1]  103.89,112.01 0 bottom
LOGO30  QWIIC_LOGO_CONNECTOR  [QWIIC_5.5MM]  111.51,124.21 0 top
LOGO31  SFE_LOGO_NAME_FLAME.1_INCH  [SFE_LOGO_NAME_FLAME_.1]  43.43,153.03 0 top
LOGO32  QWIIC_LOGO_CONNECTOR  [QWIIC_5.5MM]  67.31,137.29 0 top
LOGO33  OSHW-LOGOMINI  [OSHW-LOGO-MINI]  11.94,148.08 0 bottom
LOGO34  SFE_LOGO_NAME_FLAME.1_INCH  [SFE_LOGO_NAME_FLAME_.1]  39.88,153.16 0 bottom
LOGO35  QWIIC_LOGO_CONNECTOR  [QWIIC_5.5MM]  47.5,165.35 0 top
LOGO36  SFE_LOGO_NAME_FLAME.1_INCH  [SFE_LOGO_NAME_FLAME_.1]  107.44,153.03 0 top
LOGO37  QWIIC_LOGO_CONNECTOR  [QWIIC_5.5MM]  131.32,137.29 0 top
LOGO38  OSHW-LOGOMINI  [OSHW-LOGO-MINI]  75.95,148.08 0 bottom
LOGO39  SFE_LOGO_NAME_FLAME.1_INCH  [SFE_LOGO_NAME_FLAME_.1]  103.89,153.16 0 bottom
LOGO40  QWIIC_LOGO_CONNECTOR  [QWIIC_5.5MM]  111.51,165.35 0 top
MEAS  [COMBO-JUMPER_2_NC_TRACE]  20.07,13.21 180 bottom
MEAS1  [COMBO-JUMPER_2_NC_TRACE]  84.07,13.21 180 bottom
MEAS2  [COMBO-JUMPER_2_NC_TRACE]  20.07,54.36 180 bottom
MEAS3  [COMBO-JUMPER_2_NC_TRACE]  84.07,54.36 180 bottom
MEAS4  [COMBO-JUMPER_2_NC_TRACE]  20.07,95.5 180 bottom
MEAS5  [COMBO-JUMPER_2_NC_TRACE]  84.07,95.5 180 bottom
MEAS6  [COMBO-JUMPER_2_NC_TRACE]  20.07,136.65 180 bottom
MEAS7  [COMBO-JUMPER_2_NC_TRACE]  84.07,136.65 180 bottom
MEAS_BATT  [COMBO-JUMPER_2_NC_TRACE]  20.19,28.45 270 bottom
MEAS_BATT1  [COMBO-JUMPER_2_NC_TRACE]  84.2,28.45 270 bottom
MEAS_BATT2  [COMBO-JUMPER_2_NC_TRACE]  20.19,69.6 270 bottom
MEAS_BATT3  [COMBO-JUMPER_2_NC_TRACE]  84.2,69.6 270 bottom
MEAS_BATT4  [COMBO-JUMPER_2_NC_TRACE]  20.19,110.74 270 bottom
MEAS_BATT5  [COMBO-JUMPER_2_NC_TRACE]  84.2,110.74 270 bottom
MEAS_BATT6  [COMBO-JUMPER_2_NC_TRACE]  20.19,151.89 270 bottom
MEAS_BATT7  [COMBO-JUMPER_2_NC_TRACE]  84.2,151.89 270 bottom
R1  2.2k  [0603]  69.09,23.37 90 top
R2  5.1k  [0603]  17.02,19.56 270 top
R3  5.1k  [0603]  17.02,14.48 90 top
R4  2.2k  [0603]  66.8,23.37 90 top
R5  100k  [0603]  22.1,17.02 270 top
R6  2.2k  [0603]  25.91,34.8 270 top
R7  1k  [0603]  24.38,38.61 90 top
R8  3.3k  [0603]  58.55,44.96 270 top
R9  10k  [0603]  24.64,22.1 90 top
R10  20k  [0603]  23.11,22.1 270 top
R11  1k  [0603]  17.02,10.67 0 top
R12  4.7k  [0603]  20.83,10.67 0 top
R13  100k  [0603]  60.2,14.48 0 top
R14  100k  [0603]  60.2,19.56 0 top
R15  100k  [0603]  58.55,24.64 0 top
R16  5.1k  [0603]  81.03,19.56 270 top
R17  5.1k  [0603]  81.03,14.48 90 top
R18  3.3k  [0603]  122.55,44.96 270 top
R19  2.2k  [0603]  133.1,23.37 90 top
R20  2.2k  [0603]  130.81,23.37 90 top
R21  10k  [0603]  88.65,22.1 90 top
R22  20k  [0603]  87.12,22.1 270 top
R23  100k  [0603]  86.11,17.02 270 top
R24  2.2k  [0603]  89.92,34.8 270 top
R25  1k  [0603]  88.39,38.61 90 top
R26  1k  [0603]  81.03,10.67 0 top
R27  4.7k  [0603]  84.84,10.67 0 top
R28  100k  [0603]  124.21,14.48 0 top
R29  100k  [0603]  124.21,19.56 0 top
R30  100k  [0603]  122.55,24.64 0 top
R31  5.1k  [0603]  17.02,60.71 270 top
R32  5.1k  [0603]  17.02,55.63 90 top
R33  3.3k  [0603]  58.55,86.11 270 top
R34  2.2k  [0603]  69.09,64.52 90 top
R35  2.2k  [0603]  66.8,64.52 90 top
R36  10k  [0603]  24.64,63.25 90 top
R37  20k  [0603]  23.11,63.25 270 top
R38  100k  [0603]  22.1,58.17 270 top
R39  2.2k  [0603]  25.91,75.95 270 top
R40  1k  [0603]  24.38,79.76 90 top
R41  1k  [0603]  17.02,51.82 0 top
R42  4.7k  [0603]  20.83,51.82 0 top
R43  100k  [0603]  60.2,55.63 0 top
R44  100k  [0603]  60.2,60.71 0 top
R45  100k  [0603]  58.55,65.79 0 top
R46  5.1k  [0603]  81.03,60.71 270 top
R47  5.1k  [0603]  81.03,55.63 90 top
R48  3.3k  [0603]  122.55,86.11 270 top
R49  2.2k  [0603]  133.1,64.52 90 top
R50  2.2k  [0603]  130.81,64.52 90 top
R51  10k  [0603]  88.65,63.25 90 top
R52  20k  [0603]  87.12,63.25 270 top
R53  100k  [0603]  86.11,58.17 270 top
R54  2.2k  [0603]  89.92,75.95 270 top
R55  1k  [0603]  88.39,79.76 90 top
R56  1k  [0603]  81.03,51.82 0 top
R57  4.7k  [0603]  84.84,51.82 0 top
R58  100k  [0603]  124.21,55.63 0 top
R59  100k  [0603]  124.21,60.71 0 top
R60  100k  [0603]  122.55,65.79 0 top
R61  5.1k  [0603]  17.02,101.85 270 top
R62  5.1k  [0603]  17.02,96.77 90 top
R63  3.3k  [0603]  58.55,127.25 270 top
R64  2.2k  [0603]  69.09,105.66 90 top
R65  2.2k  [0603]  66.8,105.66 90 top
R66  10k  [0603]  24.64,104.39 90 top
R67  20k  [0603]  23.11,104.39 270 top
R68  100k  [0603]  22.1,99.31 270 top
R69  2.2k  [0603]  25.91,117.09 270 top
R70  1k  [0603]  24.38,120.9 90 top
R71  1k  [0603]  17.02,92.96 0 top
R72  4.7k  [0603]  20.83,92.96 0 top
R73  100k  [0603]  60.2,96.77 0 top
R74  100k  [0603]  60.2,101.85 0 top
R75  100k  [0603]  58.55,106.93 0 top
R76  5.1k  [0603]  81.03,101.85 270 top
R77  5.1k  [0603]  81.03,96.77 90 top
R78  3.3k  [0603]  122.55,127.25 270 top
R79  2.2k  [0603]  133.1,105.66 90 top
R80  2.2k  [0603]  130.81,105.66 90 top
R81  10k  [0603]  88.65,104.39 90 top
R82  20k  [0603]  87.12,104.39 270 top
R83  100k  [0603]  86.11,99.31 270 top
R84  2.2k  [0603]  89.92,117.09 270 top
R85  1k  [0603]  88.39,120.9 90 top
R86  1k  [0603]  81.03,92.96 0 top
R87  4.7k  [0603]  84.84,92.96 0 top
R88  100k  [0603]  124.21,96.77 0 top
R89  100k  [0603]  124.21,101.85 0 top
R90  100k  [0603]  122.55,106.93 0 top
R91  5.1k  [0603]  17.02,143 270 top
R92  5.1k  [0603]  17.02,137.92 90 top
R93  3.3k  [0603]  58.55,168.4 270 top
R94  2.2k  [0603]  69.09,146.81 90 top
R95  2.2k  [0603]  66.8,146.81 90 top
R96  10k  [0603]  24.64,145.54 90 top
R97  20k  [0603]  23.11,145.54 270 top
R98  100k  [0603]  22.1,140.46 270 top
R99  2.2k  [0603]  25.91,158.24 270 top
R100  1k  [0603]  24.38,162.05 90 top
R101  1k  [0603]  17.02,134.11 0 top
R102  4.7k  [0603]  20.83,134.11 0 top
R103  100k  [0603]  60.2,137.92 0 top
R104  100k  [0603]  60.2,143 0 top
R105  100k  [0603]  58.55,148.08 0 top
R106  5.1k  [0603]  81.03,143 270 top
R107  5.1k  [0603]  81.03,137.92 90 top
R108  3.3k  [0603]  122.55,168.4 270 top
R109  2.2k  [0603]  133.1,146.81 90 top
R110  2.2k  [0603]  130.81,146.81 90 top
R111  10k  [0603]  88.65,145.54 90 top
R112  20k  [0603]  87.12,145.54 270 top
R113  100k  [0603]  86.11,140.46 270 top
R114  2.2k  [0603]  89.92,158.24 270 top
R115  1k  [0603]  88.39,162.05 90 top
R116  1k  [0603]  81.03,134.11 0 top
R117  4.7k  [0603]  84.84,134.11 0 top
R118  100k  [0603]  124.21,137.92 0 top
R119  100k  [0603]  124.21,143 0 top
R120  100k  [0603]  122.55,148.08 0 top
S1  Reset  [TACTILE_SWITCH_SMD_5.2MM]  38.61,11.05 180 top
S2  BOOT  [TACTILE_SWITCH_SMD_5.2MM]  30.99,11.05 180 top
S3  Reset  [TACTILE_SWITCH_SMD_5.2MM]  102.62,11.05 180 top
S4  BOOT  [TACTILE_SWITCH_SMD_5.2MM]  95,11.05 180 top
S5  Reset  [TACTILE_SWITCH_SMD_5.2MM]  38.61,52.2 180 top
S6  BOOT  [TACTILE_SWITCH_SMD_5.2MM]  30.99,52.2 180 top
S7  Reset  [TACTILE_SWITCH_SMD_5.2MM]  102.62,52.2 180 top
S8  BOOT  [TACTILE_SWITCH_SMD_5.2MM]  95,52.2 180 top
S9  Reset  [TACTILE_SWITCH_SMD_5.2MM]  38.61,93.34 180 top
S10  BOOT  [TACTILE_SWITCH_SMD_5.2MM]  30.99,93.34 180 top
S11  Reset  [TACTILE_SWITCH_SMD_5.2MM]  102.62,93.34 180 top
S12  BOOT  [TACTILE_SWITCH_SMD_5.2MM]  95,93.34 180 top
S13  Reset  [TACTILE_SWITCH_SMD_5.2MM]  38.61,134.49 180 top
S14  BOOT  [TACTILE_SWITCH_SMD_5.2MM]  30.99,134.49 180 top
S15  Reset  [TACTILE_SWITCH_SMD_5.2MM]  102.62,134.49 180 top
S16  BOOT  [TACTILE_SWITCH_SMD_5.2MM]  95,134.49 180 top
U1  3.3V  [SOT23-5]  60.2,17.02 270 top
U2  MCP73831  [SOT23-5]  23.37,34.8 180 top
U3  3.3V  [SOT23-5]  60.2,22.1 270 top
U4  AP7361C-33  [UDFN-8]  83.57,17.02 0 top
U5  AP7361C-33  [UDFN-8]  19.56,17.02 0 top
U6  MCP73831  [SOT23-5]  87.38,34.8 180 top
U7  3.3V  [SOT23-5]  124.21,17.02 270 top
U8  3.3V  [SOT23-5]  124.21,22.1 270 top
U9  AP7361C-33  [UDFN-8]  19.56,58.17 0 top
U10  MCP73831  [SOT23-5]  23.37,75.95 180 top
U11  3.3V  [SOT23-5]  60.2,58.17 270 top
U12  3.3V  [SOT23-5]  60.2,63.25 270 top
U13  AP7361C-33  [UDFN-8]  83.57,58.17 0 top
U14  MCP73831  [SOT23-5]  87.38,75.95 180 top
U15  3.3V  [SOT23-5]  124.21,58.17 270 top
U16  3.3V  [SOT23-5]  124.21,63.25 270 top
U17  AP7361C-33  [UDFN-8]  19.56,99.31 0 top
U18  MCP73831  [SOT23-5]  23.37,117.09 180 top
U19  3.3V  [SOT23-5]  60.2,99.31 270 top
U20  3.3V  [SOT23-5]  60.2,104.39 270 top
U21  AP7361C-33  [UDFN-8]  83.57,99.31 0 top
U22  MCP73831  [SOT23-5]  87.38,117.09 180 top
U23  3.3V  [SOT23-5]  124.21,99.31 270 top
U24  3.3V  [SOT23-5]  124.21,104.39 270 top
U25  AP7361C-33  [UDFN-8]  19.56,140.46 0 top
U26  MCP73831  [SOT23-5]  23.37,158.24 180 top
U27  3.3V  [SOT23-5]  60.2,140.46 270 top
U28  3.3V  [SOT23-5]  60.2,145.54 270 top
U29  AP7361C-33  [UDFN-8]  83.57,140.46 0 top
U30  MCP73831  [SOT23-5]  87.38,158.24 180 top
U31  3.3V  [SOT23-5]  124.21,140.46 270 top
U32  3.3V  [SOT23-5]  124.21,145.54 270 top
U$1  [SFE_LOGO_FLAME_.1]  11.94,29.72 0 bottom
U$2  [#D1#0]  30.99,40 90 bottom
U$3  [#D0#0]  33.53,39.75 90 bottom
U$4  [#3V3#2]  18.67,10.67 0 bottom
U$5  [#BATT#0]  18.29,25.53 90 bottom
U$6  [#GND#0]  15.75,41.27 90 top
U$7  [#SCK#0]  25.91,41.53 90 top
U$8  [#SCK#0]  25.91,41.53 90 bottom
U$9  [#PWM1#1]  36.07,37.59 90 bottom
U$10  [#PWM0#0]  38.61,37.34 90 bottom
U$11  [MICROSD0]  56.52,41.02 0 top
U$12  [#A1#2]  41.15,40 90 bottom
U$13  [#A0#3]  43.69,39.88 90 bottom
U$14  [MOUNT0]  44.58,40.26 0 top
U$15  [LIPO0]  10.67,40 0 top
U$16  [DATA0]  40.77,25.91 0 top
U$17  [#RX1#1]  46.23,8.76 90 bottom
U$18  [#GND#0]  15.75,41.27 90 bottom
U$19  [LOGGING1]  39.12,24.26 0 top
U$20  [22220]  36.7,15.62 0 top
U$21  [#TX1#2]  48.77,8.64 90 bottom
U$22  [#I2C#0]  67.82,24.77 90 bottom
U$23  [DATA0]  46.99,25.65 0 bottom
U$24  [#GND#0]  43.69,8.64 90 top
U$25  [#G1#3V3#0]  51.31,8.64 90 bottom
U$26  [LOGGING1]  41.27,25.65 0 bottom
U$27  [#GND#0]  43.69,8.64 90 bottom
U$28  [#MEAS#3]  22.99,14.99 0 bottom
U$29  [#G2#3V3#3]  56.39,8.64 90 bottom
U$30  [#RST#0]  34.29,10.67 0 bottom
U$31  [#SDA#4]  58.93,8.76 90 bottom
U$32  [#GND#0]  53.85,8.64 90 top
U$33  [#VIN#1]  25.02,10.67 0 bottom
U$34  [#GND#0]  53.34,46.23 0 bottom
U$35  [#SCL#5]  61.47,8.76 90 bottom
U$36  [#GND#0]  53.85,8.64 90 bottom
U$37  [MICROMOD_LOGO_.35]  38.61,27.94 0 bottom
U$38  [##INT##6]  64.01,8.76 90 bottom
U$39  [#CIPO#0]  20.83,41.02 90 top
U$40  [#CIPO#0]  20.83,41.02 90 bottom
U$41  [#VE#0]  28.96,15.75 0 bottom
U$42  [#GND#0]  48.77,46.23 0 top
U$43  [MICROMOD_MI_LOGO_.35]  75.95,27.18 0 bottom
U$44  [MICROMOD_LOGO_.35]  108.58,27.81 0 top
U$45  [SFE_LOGO_FLAME_.1]  88.65,8.76 0 top
U$46  [MICROMOD_LOGO_.35]  102.62,27.94 0 bottom
U$47  [SFE_LOGO_FLAME_.1]  75.95,29.72 0 bottom
U$48  [#COPI#0]  87.38,40.89 90 top
U$49  [#COPI#0]  87.38,40.89 90 bottom
U$50  [##CS##0]  18.29,42.54 90 top
U$51  [##CS##0]  18.29,42.54 90 bottom
U$52  [#SCK#0]  89.92,41.53 90 top
U$53  [#SCK#0]  89.92,41.53 90 bottom
U$54  [##CS##0]  82.3,42.54 90 top
U$55  [##CS##0]  82.3,42.54 90 bottom
U$56  [#G1_3V3#0]  92.46,39.37 90 top
U$57  [#G1_3V3#0]  92.46,39.37 90 bottom
U$58  [#D1#0]  95,40 90 top
U$59  [#D0#0]  97.54,39.75 90 top
U$60  [#A0#3]  107.7,39.88 90 top
U$61  [#A1#2]  105.16,40 90 top
U$62  [MICROMOD_MI_LOGO_.35]  11.94,27.18 0 bottom
U$63  [MICROMOD_LOGO_.35]  44.58,27.81 0 top
U$64  [#G1_3V3#0]  28.45,39.37 90 top
U$65  [#G1_3V3#0]  28.45,39.37 90 bottom
U$66  [SFE_LOGO_FLAME_.1]  24.64,8.76 0 top
U$67  [#PWM0#0]  102.62,37.34 90 top
U$68  [#PWM1#1]  100.08,37.59 90 top
U$69  [##INT##6]  128.02,8.76 90 top
U$70  [#G2#3V3#3]  120.4,8.64 90 top
U$71  [#RX1#1]  110.24,8.76 90 top
U$72  [#COPI#0]  23.37,40.89 90 top
U$73  [#COPI#0]  23.37,40.89 90 bottom
U$74  [#SCL#5]  125.48,8.76 90 top
U$75  [#SDA#4]  122.94,8.76 90 top
U$76  [#D1#0]  30.99,40 90 top
U$77  [#D0#0]  33.53,39.75 90 top
U$78  [#A0#3]  43.69,39.88 90 top
U$79  [#A1#2]  41.15,40 90 top
U$80  [#PWM0#0]  38.61,37.34 90 top
U$81  [#PWM1#1]  36.07,37.59 90 top
U$82  [##INT##6]  64.01,8.76 90 top
U$83  [#G2#3V3#3]  56.39,8.64 90 top
U$84  [#TX1#2]  112.78,8.64 90 top
U$85  [#G1#3V3#0]  115.32,8.64 90 top
U$86  [#RX1#1]  46.23,8.76 90 top
U$87  [#SCL#5]  61.47,8.76 90 top
U$88  [#SDA#4]  58.93,8.76 90 top
U$89  [#TX1#2]  48.77,8.64 90 top
U$90  [#G1#3V3#0]  51.31,8.64 90 top
U$91  [BOOT0]  28.57,7.75 0 top
U$92  [RESET1]  35.94,7.75 0 top
U$93  [3V30]  14.86,8.13 0 top
U$94  [VIN1]  18.92,8.13 0 top
U$95  [#BYP#3]  13.97,27.18 0 top
U$96  [CHG1]  17.4,39.88 0 top
U$97  [SWD0]  22.1,24.89 90 top
U$98  [BOOT0]  92.58,7.75 0 top
U$99  [RESET1]  99.95,7.75 0 top
U$100  [3V30]  78.87,8.13 0 top
U$101  [VIN1]  82.93,8.13 0 top
U$102  [#BYP#3]  77.98,27.18 0 top
U$103  [CHG1]  81.41,39.88 0 top
U$104  [SWD0]  86.11,24.89 90 top
U$105  [#GND#0]  79.76,41.27 90 top
U$106  [#GND#0]  79.76,41.27 90 bottom
U$107  [#GND#0]  107.7,8.64 90 top
U$108  [#GND#0]  107.7,8.64 90 bottom
U$109  [#GND#0]  117.86,8.64 90 top
U$110  [#GND#0]  117.86,8.64 90 bottom
U$111  [#RX1#1]  110.24,8.76 90 bottom
U$112  [#TX1#2]  112.78,8.64 90 bottom
U$113  [#G1#3V3#0]  115.32,8.64 90 bottom
U$114  [#G2#3V3#3]  120.4,8.64 90 bottom
U$115  [#SDA#4]  122.94,8.76 90 bottom
U$116  [#SCL#5]  125.48,8.76 90 bottom
U$117  [##INT##6]  128.02,8.76 90 bottom
U$118  [#D1#0]  95,40 90 bottom
U$119  [#D0#0]  97.54,39.75 90 bottom
U$120  [#PWM1#1]  100.08,37.59 90 bottom
U$121  [#PWM0#0]  102.62,37.34 90 bottom
U$122  [#A1#2]  105.16,40 90 bottom
U$123  [#A0#3]  107.7,39.88 90 bottom
U$124  [MOUNT0]  108.58,40.26 0 top
U$125  [MICROSD0]  120.52,41.02 0 top
U$126  [LIPO0]  74.68,40 0 top
U$127  [DATA0]  104.77,25.91 0 top
U$128  [LOGGING1]  103.12,24.26 0 top
U$129  [22220]  100.71,15.62 0 top
U$130  [DATA0]  111,25.65 0 bottom
U$131  [LOGGING1]  105.28,25.65 0 bottom
U$132  [#I2C#0]  131.83,24.77 90 bottom
U$133  [#3V3#2]  82.68,10.67 0 bottom
U$134  [#MEAS#3]  86.99,14.99 0 bottom
U$135  [#RST#0]  98.3,10.67 0 bottom
U$136  [#VIN#1]  89.03,10.67 0 bottom
U$137  [#BATT#0]  82.3,25.53 90 bottom
U$138  [#GND#0]  117.35,46.23 0 bottom
U$139  [#CIPO#0]  84.84,41.02 90 top
U$140  [#CIPO#0]  84.84,41.02 90 bottom
U$141  [#VE#0]  92.96,15.75 0 bottom
U$142  [#GND#0]  112.78,46.23 0 top
U$143  [MICROMOD_MI_LOGO_.35]  11.94,68.33 0 bottom
U$144  [MICROMOD_LOGO_.35]  44.58,68.96 0 top
U$145  [SFE_LOGO_FLAME_.1]  24.64,49.91 0 top
U$146  [MICROMOD_LOGO_.35]  38.61,69.09 0 bottom
U$147  [SFE_LOGO_FLAME_.1]  11.94,70.87 0 bottom
U$148  [#COPI#0]  23.37,82.04 90 top
U$149  [#COPI#0]  23.37,82.04 90 bottom
U$150  [#SCK#0]  25.91,82.68 90 top
U$151  [#SCK#0]  25.91,82.68 90 bottom
U$152  [##CS##0]  18.29,83.69 90 top
U$153  [##CS##0]  18.29,83.69 90 bottom
U$154  [#G1_3V3#0]  28.45,80.52 90 top
U$155  [#G1_3V3#0]  28.45,80.52 90 bottom
U$156  [#D1#0]  30.99,81.15 90 top
U$157  [#D0#0]  33.53,80.9 90 top
U$158  [#A0#3]  43.69,81.03 90 top
U$159  [#A1#2]  41.15,81.15 90 top
U$160  [#PWM0#0]  38.61,78.49 90 top
U$161  [#PWM1#1]  36.07,78.74 90 top
U$162  [##INT##6]  64.01,49.91 90 top
U$163  [#G2#3V3#3]  56.39,49.78 90 top
U$164  [#RX1#1]  46.23,49.91 90 top
U$165  [#SCL#5]  61.47,49.91 90 top
U$166  [#SDA#4]  58.93,49.91 90 top
U$167  [#TX1#2]  48.77,49.78 90 top
U$168  [#G1#3V3#0]  51.31,49.78 90 top
U$169  [BOOT0]  28.57,48.89 0 top
U$170  [RESET1]  35.94,48.89 0 top
U$171  [3V30]  14.86,49.28 0 top
U$172  [VIN1]  18.92,49.28 0 top
U$173  [#BYP#3]  13.97,68.33 0 top
U$174  [CHG1]  17.4,81.03 0 top
U$175  [SWD0]  22.1,66.04 90 top
U$176  [#GND#0]  15.75,82.42 90 top
U$177  [#GND#0]  15.75,82.42 90 bottom
U$178  [#GND#0]  43.69,49.78 90 top
U$179  [#GND#0]  43.69,49.78 90 bottom
U$180  [#GND#0]  53.85,49.78 90 top
U$181  [#GND#0]  53.85,49.78 90 bottom
U$182  [#RX1#1]  46.23,49.91 90 bottom
U$183  [#TX1#2]  48.77,49.78 90 bottom
U$184  [#G1#3V3#0]  51.31,49.78 90 bottom
U$185  [#G2#3V3#3]  56.39,49.78 90 bottom
U$186  [#SDA#4]  58.93,49.91 90 bottom
U$187  [#SCL#5]  61.47,49.91 90 bottom
U$188  [##INT##6]  64.01,49.91 90 bottom
U$189  [#D1#0]  30.99,81.15 90 bottom
U$190  [#D0#0]  33.53,80.9 90 bottom
U$191  [#PWM1#1]  36.07,78.74 90 bottom
U$192  [#PWM0#0]  38.61,78.49 90 bottom
U$193  [#A1#2]  41.15,81.15 90 bottom
U$194  [#A0#3]  43.69,81.03 90 bottom
U$195  [MOUNT0]  44.58,81.41 0 top
U$196  [MICROSD0]  56.52,82.17 0 top
U$197  [LIPO0]  10.67,81.15 0 top
U$198  [DATA0]  40.77,67.06 0 top
U$199  [LOGGING1]  39.12,65.41 0 top
U$200  [22220]  36.7,56.77 0 top
U$201  [DATA0]  46.99,66.8 0 bottom
U$202  [LOGGING1]  41.27,66.8 0 bottom
U$203  [#I2C#0]  67.82,65.91 90 bottom
U$204  [#3V3#2]  18.67,51.82 0 bottom
U$205  [#MEAS#3]  22.99,56.13 0 bottom
U$206  [#RST#0]  34.29,51.82 0 bottom
U$207  [#VIN#1]  25.02,51.82 0 bottom
U$208  [#BATT#0]  18.29,66.67 90 bottom
U$209  [#GND#0]  53.34,87.38 0 bottom
U$210  [#CIPO#0]  20.83,82.17 90 top
U$211  [#CIPO#0]  20.83,82.17 90 bottom
U$212  [#VE#0]  28.96,56.9 0 bottom
U$213  [#GND#0]  48.77,87.38 0 top
U$214  [MICROMOD_MI_LOGO_.35]  75.95,68.33 0 bottom
U$215  [MICROMOD_LOGO_.35]  108.58,68.96 0 top
U$216  [SFE_LOGO_FLAME_.1]  88.65,49.91 0 top
U$217  [MICROMOD_LOGO_.35]  102.62,69.09 0 bottom
U$218  [SFE_LOGO_FLAME_.1]  75.95,70.87 0 bottom
U$219  [#COPI#0]  87.38,82.04 90 top
U$220  [#COPI#0]  87.38,82.04 90 bottom
U$221  [#SCK#0]  89.92,82.68 90 top
U$222  [#SCK#0]  89.92,82.68 90 bottom
U$223  [##CS##0]  82.3,83.69 90 top
U$224  [##CS##0]  82.3,83.69 90 bottom
U$225  [#G1_3V3#0]  92.46,80.52 90 top
U$226  [#G1_3V3#0]  92.46,80.52 90 bottom
U$227  [#D1#0]  95,81.15 90 top
U$228  [#D0#0]  97.54,80.9 90 top
U$229  [#A0#3]  107.7,81.03 90 top
U$230  [#A1#2]  105.16,81.15 90 top
U$231  [#PWM0#0]  102.62,78.49 90 top
U$232  [#PWM1#1]  100.08,78.74 90 top
U$233  [##INT##6]  128.02,49.91 90 top
U$234  [#G2#3V3#3]  120.4,49.78 90 top
U$235  [#RX1#1]  110.24,49.91 90 top
U$236  [#SCL#5]  125.48,49.91 90 top
U$237  [#SDA#4]  122.94,49.91 90 top
U$238  [#TX1#2]  112.78,49.78 90 top
U$239  [#G1#3V3#0]  115.32,49.78 90 top
U$240  [BOOT0]  92.58,48.89 0 top
U$241  [RESET1]  99.95,48.89 0 top
U$242  [3V30]  78.87,49.28 0 top
U$243  [VIN1]  82.93,49.28 0 top
U$244  [#BYP#3]  77.98,68.33 0 top
U$245  [CHG1]  81.41,81.03 0 top
U$246  [SWD0]  86.11,66.04 90 top
U$247  [#GND#0]  79.76,82.42 90 top
U$248  [#GND#0]  79.76,82.42 90 bottom
U$249  [#GND#0]  107.7,49.78 90 top
U$250  [#GND#0]  107.7,49.78 90 bottom
U$251  [#GND#0]  117.86,49.78 90 top
U$252  [#GND#0]  117.86,49.78 90 bottom
U$253  [#RX1#1]  110.24,49.91 90 bottom
U$254  [#TX1#2]  112.78,49.78 90 bottom
U$255  [#G1#3V3#0]  115.32,49.78 90 bottom
U$256  [#G2#3V3#3]  120.4,49.78 90 bottom
U$257  [#SDA#4]  122.94,49.91 90 bottom
U$258  [#SCL#5]  125.48,49.91 90 bottom
U$259  [##INT##6]  128.02,49.91 90 bottom
U$260  [#D1#0]  95,81.15 90 bottom
U$261  [#D0#0]  97.54,80.9 90 bottom
U$262  [#PWM1#1]  100.08,78.74 90 bottom
U$263  [#PWM0#0]  102.62,78.49 90 bottom
U$264  [#A1#2]  105.16,81.15 90 bottom
U$265  [#A0#3]  107.7,81.03 90 bottom
U$266  [MOUNT0]  108.58,81.41 0 top
U$267  [MICROSD0]  120.52,82.17 0 top
U$268  [LIPO0]  74.68,81.15 0 top
U$269  [DATA0]  104.77,67.06 0 top
U$270  [LOGGING1]  103.12,65.41 0 top
U$271  [22220]  100.71,56.77 0 top
U$272  [DATA0]  111,66.8 0 bottom
U$273  [LOGGING1]  105.28,66.8 0 bottom
U$274  [#I2C#0]  131.83,65.91 90 bottom
U$275  [#3V3#2]  82.68,51.82 0 bottom
U$276  [#MEAS#3]  86.99,56.13 0 bottom
U$277  [#RST#0]  98.3,51.82 0 bottom
U$278  [#VIN#1]  89.03,51.82 0 bottom
U$279  [#BATT#0]  82.3,66.67 90 bottom
U$280  [#GND#0]  117.35,87.38 0 bottom
U$281  [#CIPO#0]  84.84,82.17 90 top
U$282  [#CIPO#0]  84.84,82.17 90 bottom
U$283  [#VE#0]  92.96,56.9 0 bottom
U$284  [#GND#0]  112.78,87.38 0 top
U$285  [MICROMOD_MI_LOGO_.35]  11.94,109.47 0 bottom
U$286  [MICROMOD_LOGO_.35]  44.58,110.11 0 top
U$287  [SFE_LOGO_FLAME_.1]  24.64,91.06 0 top
U$288  [MICROMOD_LOGO_.35]  38.61,110.24 0 bottom
U$289  [SFE_LOGO_FLAME_.1]  11.94,112.01 0 bottom
U$290  [#COPI#0]  23.37,123.19 90 top
U$291  [#COPI#0]  23.37,123.19 90 bottom
U$292  [#SCK#0]  25.91,123.83 90 top
U$293  [#SCK#0]  25.91,123.83 90 bottom
U$294  [##CS##0]  18.29,124.84 90 top
U$295  [##CS##0]  18.29,124.84 90 bottom
U$296  [#G1_3V3#0]  28.45,121.67 90 top
U$297  [#G1_3V3#0]  28.45,121.67 90 bottom
U$298  [#D1#0]  30.99,122.3 90 top
U$299  [#D0#0]  33.53,122.05 90 top
U$300  [#A0#3]  43.69,122.17 90 top
U$301  [#A1#2]  41.15,122.3 90 top
U$302  [#PWM0#0]  38.61,119.63 90 top
U$303  [#PWM1#1]  36.07,119.89 90 top
U$304  [##INT##6]  64.01,91.06 90 top
U$305  [#G2#3V3#3]  56.39,90.93 90 top
U$306  [#RX1#1]  46.23,91.06 90 top
U$307  [#SCL#5]  61.47,91.06 90 top
U$308  [#SDA#4]  58.93,91.06 90 top
U$309  [#TX1#2]  48.77,90.93 90 top
U$310  [#G1#3V3#0]  51.31,90.93 90 top
U$311  [BOOT0]  28.57,90.04 0 top
U$312  [RESET1]  35.94,90.04 0 top
U$313  [3V30]  14.86,90.42 0 top
U$314  [VIN1]  18.92,90.42 0 top
U$315  [#BYP#3]  13.97,109.47 0 top
U$316  [CHG1]  17.4,122.17 0 top
U$317  [SWD0]  22.1,107.19 90 top
U$318  [#GND#0]  15.75,123.57 90 top
U$319  [#GND#0]  15.75,123.57 90 bottom
U$320  [#GND#0]  43.69,90.93 90 top
U$321  [#GND#0]  43.69,90.93 90 bottom
U$322  [#GND#0]  53.85,90.93 90 top
U$323  [#GND#0]  53.85,90.93 90 bottom
U$324  [#RX1#1]  46.23,91.06 90 bottom
U$325  [#TX1#2]  48.77,90.93 90 bottom
U$326  [#G1#3V3#0]  51.31,90.93 90 bottom
U$327  [#G2#3V3#3]  56.39,90.93 90 bottom
U$328  [#SDA#4]  58.93,91.06 90 bottom
U$329  [#SCL#5]  61.47,91.06 90 bottom
U$330  [##INT##6]  64.01,91.06 90 bottom
U$331  [#D1#0]  30.99,122.3 90 bottom
U$332  [#D0#0]  33.53,122.05 90 bottom
U$333  [#PWM1#1]  36.07,119.89 90 bottom
U$334  [#PWM0#0]  38.61,119.63 90 bottom
U$335  [#A1#2]  41.15,122.3 90 bottom
U$336  [#A0#3]  43.69,122.17 90 bottom
U$337  [MOUNT0]  44.58,122.56 0 top
U$338  [MICROSD0]  56.52,123.32 0 top
U$339  [LIPO0]  10.67,122.3 0 top
U$340  [DATA0]  40.77,108.2 0 top
U$341  [LOGGING1]  39.12,106.55 0 top
U$342  [22220]  36.7,97.92 0 top
U$343  [DATA0]  46.99,107.95 0 bottom
U$344  [LOGGING1]  41.27,107.95 0 bottom
U$345  [#I2C#0]  67.82,107.06 90 bottom
U$346  [#3V3#2]  18.67,92.96 0 bottom
U$347  [#MEAS#3]  22.99,97.28 0 bottom
U$348  [#RST#0]  34.29,92.96 0 bottom
U$349  [#VIN#1]  25.02,92.96 0 bottom
U$350  [#BATT#0]  18.29,107.82 90 bottom
U$351  [#GND#0]  53.34,128.52 0 bottom
U$352  [#CIPO#0]  20.83,123.32 90 top
U$353  [#CIPO#0]  20.83,123.32 90 bottom
U$354  [#VE#0]  28.96,98.04 0 bottom
U$355  [#GND#0]  48.77,128.52 0 top
U$356  [MICROMOD_MI_LOGO_.35]  75.95,109.47 0 bottom
U$357  [MICROMOD_LOGO_.35]  108.58,110.11 0 top
U$358  [SFE_LOGO_FLAME_.1]  88.65,91.06 0 top
U$359  [MICROMOD_LOGO_.35]  102.62,110.24 0 bottom
U$360  [SFE_LOGO_FLAME_.1]  75.95,112.01 0 bottom
U$361  [#COPI#0]  87.38,123.19 90 top
U$362  [#COPI#0]  87.38,123.19 90 bottom
U$363  [#SCK#0]  89.92,123.83 90 top
U$364  [#SCK#0]  89.92,123.83 90 bottom
U$365  [##CS##0]  82.3,124.84 90 top
U$366  [##CS##0]  82.3,124.84 90 bottom
U$367  [#G1_3V3#0]  92.46,121.67 90 top
U$368  [#G1_3V3#0]  92.46,121.67 90 bottom
U$369  [#D1#0]  95,122.3 90 top
U$370  [#D0#0]  97.54,122.05 90 top
U$371  [#A0#3]  107.7,122.17 90 top
U$372  [#A1#2]  105.16,122.3 90 top
U$373  [#PWM0#0]  102.62,119.63 90 top
U$374  [#PWM1#1]  100.08,119.89 90 top
U$375  [##INT##6]  128.02,91.06 90 top
U$376  [#G2#3V3#3]  120.4,90.93 90 top
U$377  [#RX1#1]  110.24,91.06 90 top
U$378  [#SCL#5]  125.48,91.06 90 top
U$379  [#SDA#4]  122.94,91.06 90 top
U$380  [#TX1#2]  112.78,90.93 90 top
U$381  [#G1#3V3#0]  115.32,90.93 90 top
U$382  [BOOT0]  92.58,90.04 0 top
U$383  [RESET1]  99.95,90.04 0 top
U$384  [3V30]  78.87,90.42 0 top
U$385  [VIN1]  82.93,90.42 0 top
U$386  [#BYP#3]  77.98,109.47 0 top
U$387  [CHG1]  81.41,122.17 0 top
U$388  [SWD0]  86.11,107.19 90 top
U$389  [#GND#0]  79.76,123.57 90 top
U$390  [#GND#0]  79.76,123.57 90 bottom
U$391  [#GND#0]  107.7,90.93 90 top
U$392  [#GND#0]  107.7,90.93 90 bottom
U$393  [#GND#0]  117.86,90.93 90 top
U$394  [#GND#0]  117.86,90.93 90 bottom
U$395  [#RX1#1]  110.24,91.06 90 bottom
U$396  [#TX1#2]  112.78,90.93 90 bottom
U$397  [#G1#3V3#0]  115.32,90.93 90 bottom
U$398  [#G2#3V3#3]  120.4,90.93 90 bottom
U$399  [#SDA#4]  122.94,91.06 90 bottom
U$400  [#SCL#5]  125.48,91.06 90 bottom
U$401  [##INT##6]  128.02,91.06 90 bottom
U$402  [#D1#0]  95,122.3 90 bottom
U$403  [#D0#0]  97.54,122.05 90 bottom
U$404  [#PWM1#1]  100.08,119.89 90 bottom
U$405  [#PWM0#0]  102.62,119.63 90 bottom
U$406  [#A1#2]  105.16,122.3 90 bottom
U$407  [#A0#3]  107.7,122.17 90 bottom
U$408  [MOUNT0]  108.58,122.56 0 top
U$409  [MICROSD0]  120.52,123.32 0 top
U$410  [LIPO0]  74.68,122.3 0 top
U$411  [DATA0]  104.77,108.2 0 top